# Altium PCB Relay_Card_PCB.PcbDoc (part 1 of 2)
Units mil, origin at the board's own origin, x right, y up, seen from the top; angles counter-clockwise.
Board outline 5600 x 4000 mil, 4 copper layers (Top Layer, Plane(Gnd), Place(Power), Bottom Layer), stack 23.756 mil thick; 178 components, 161 nets, 460 pads, 120 vias.
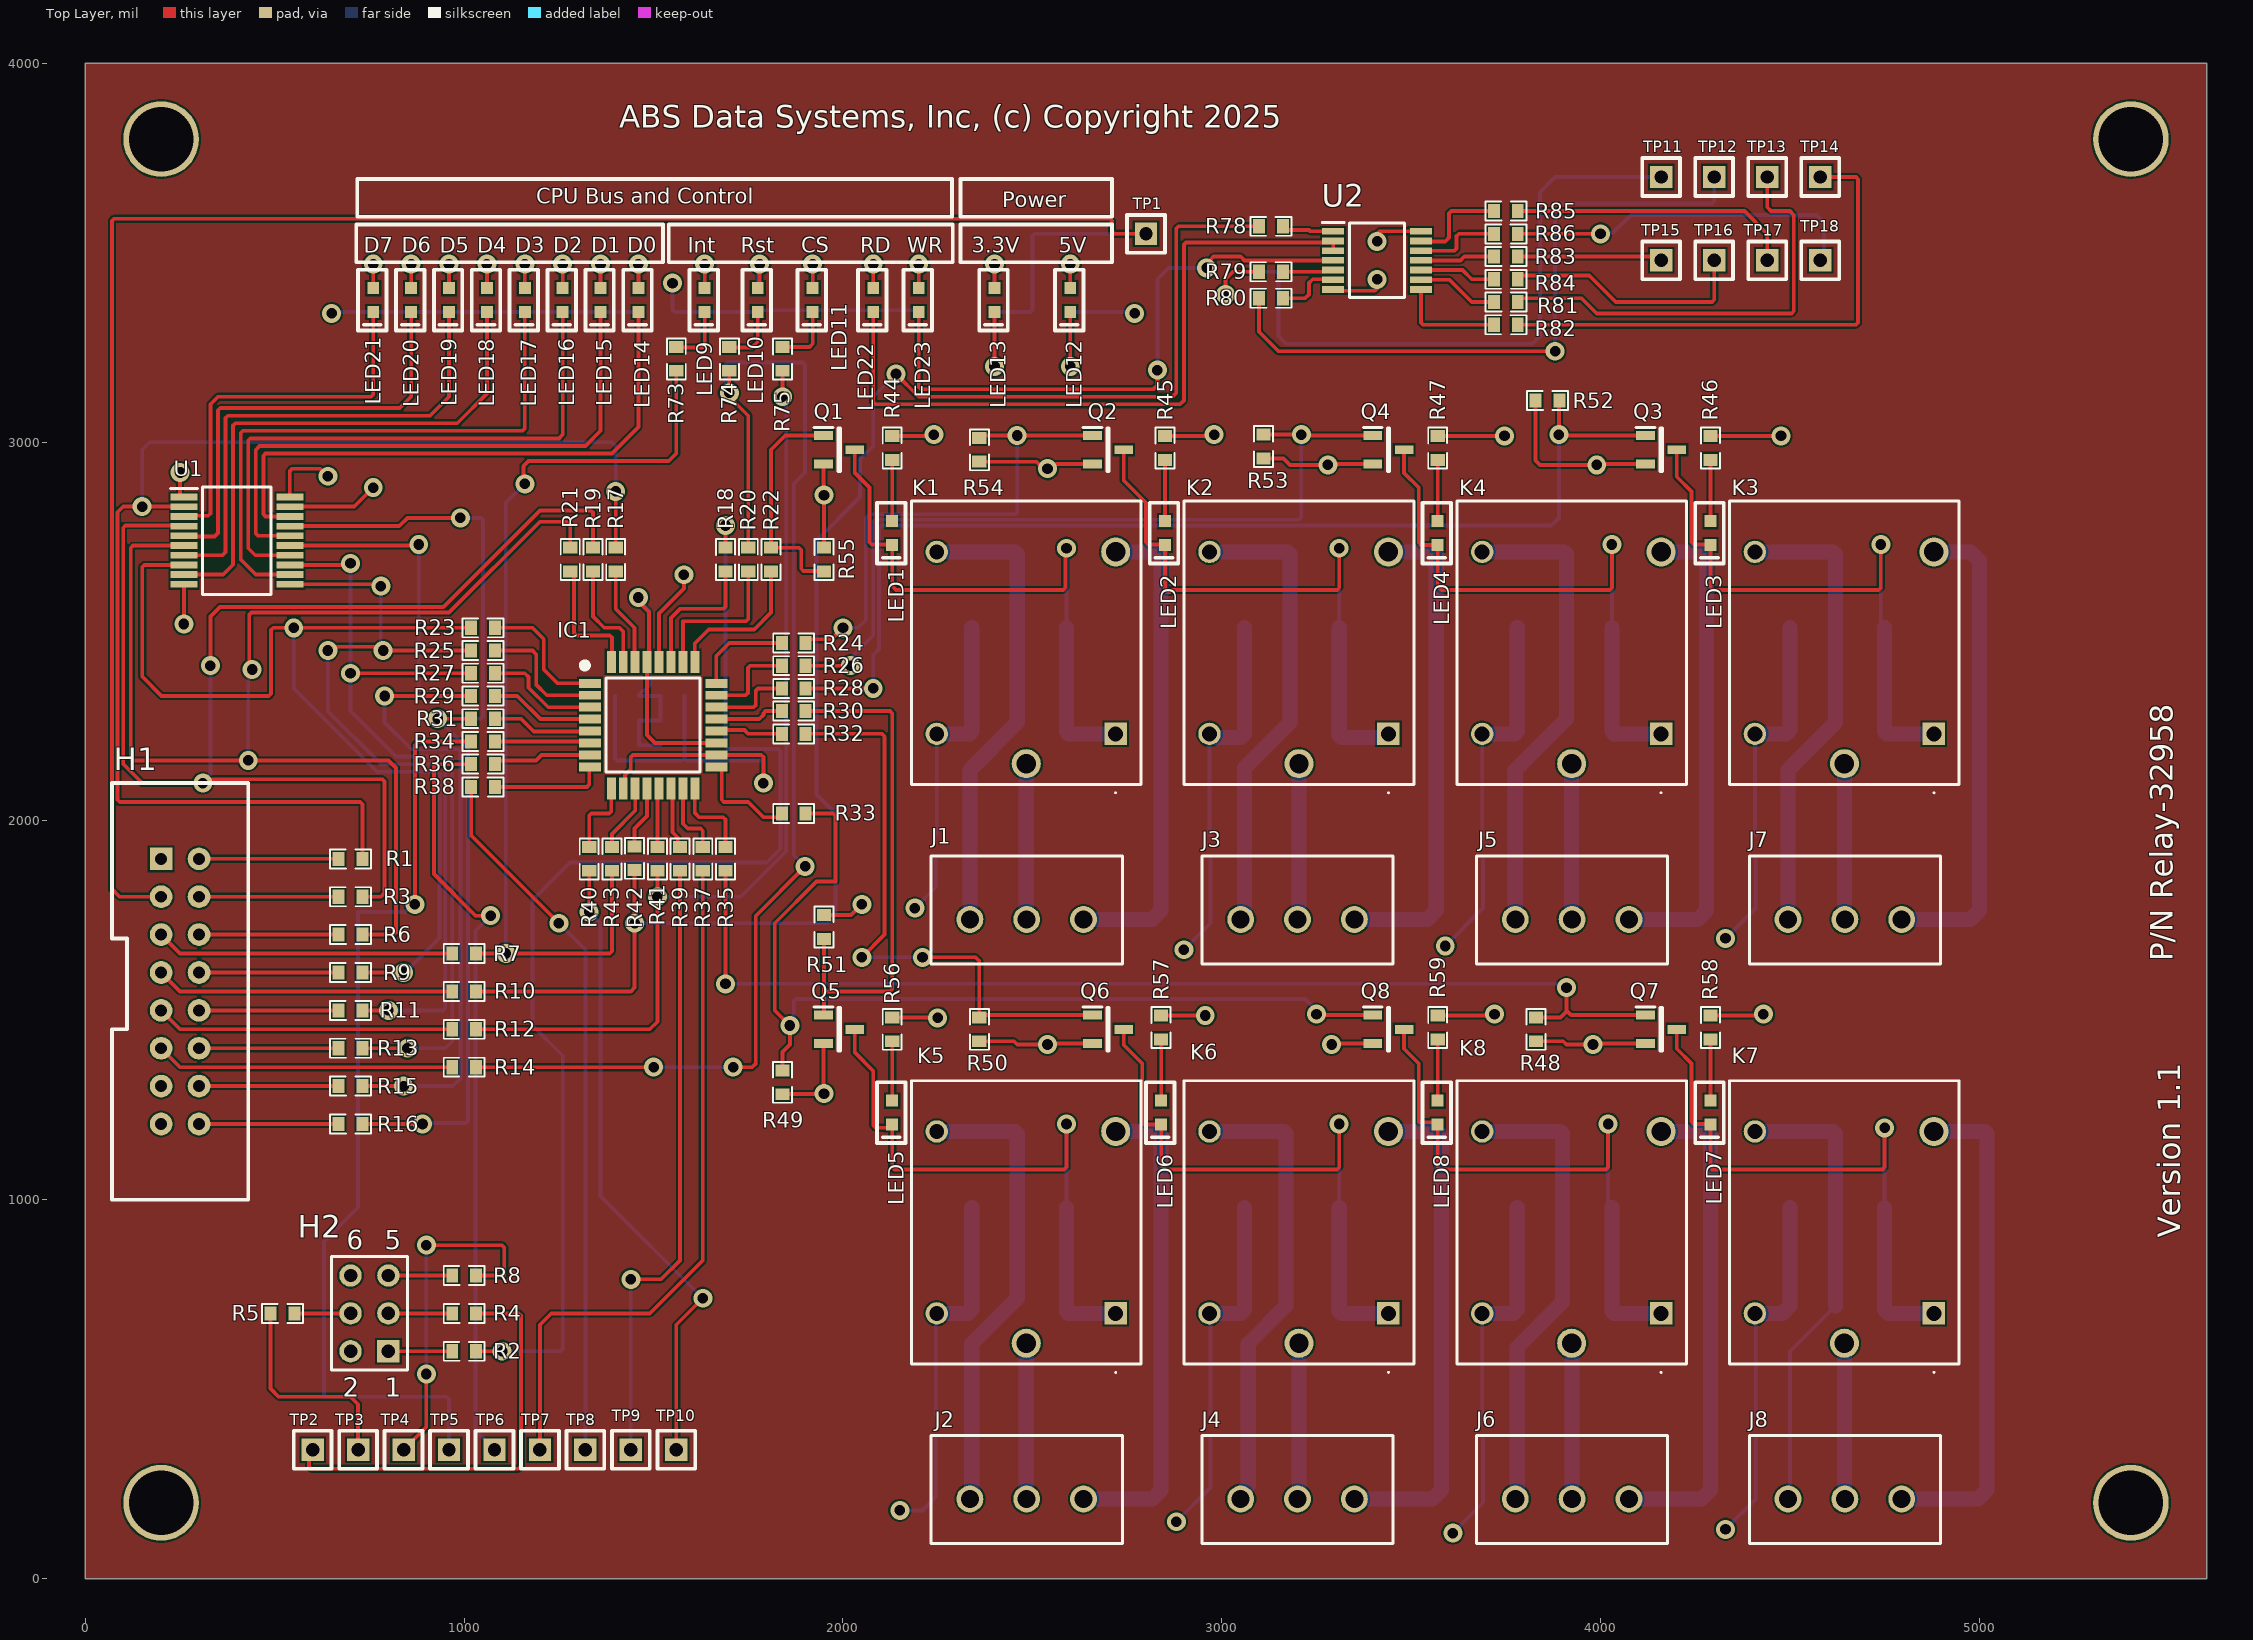
[diagram p0: Top Layer view]
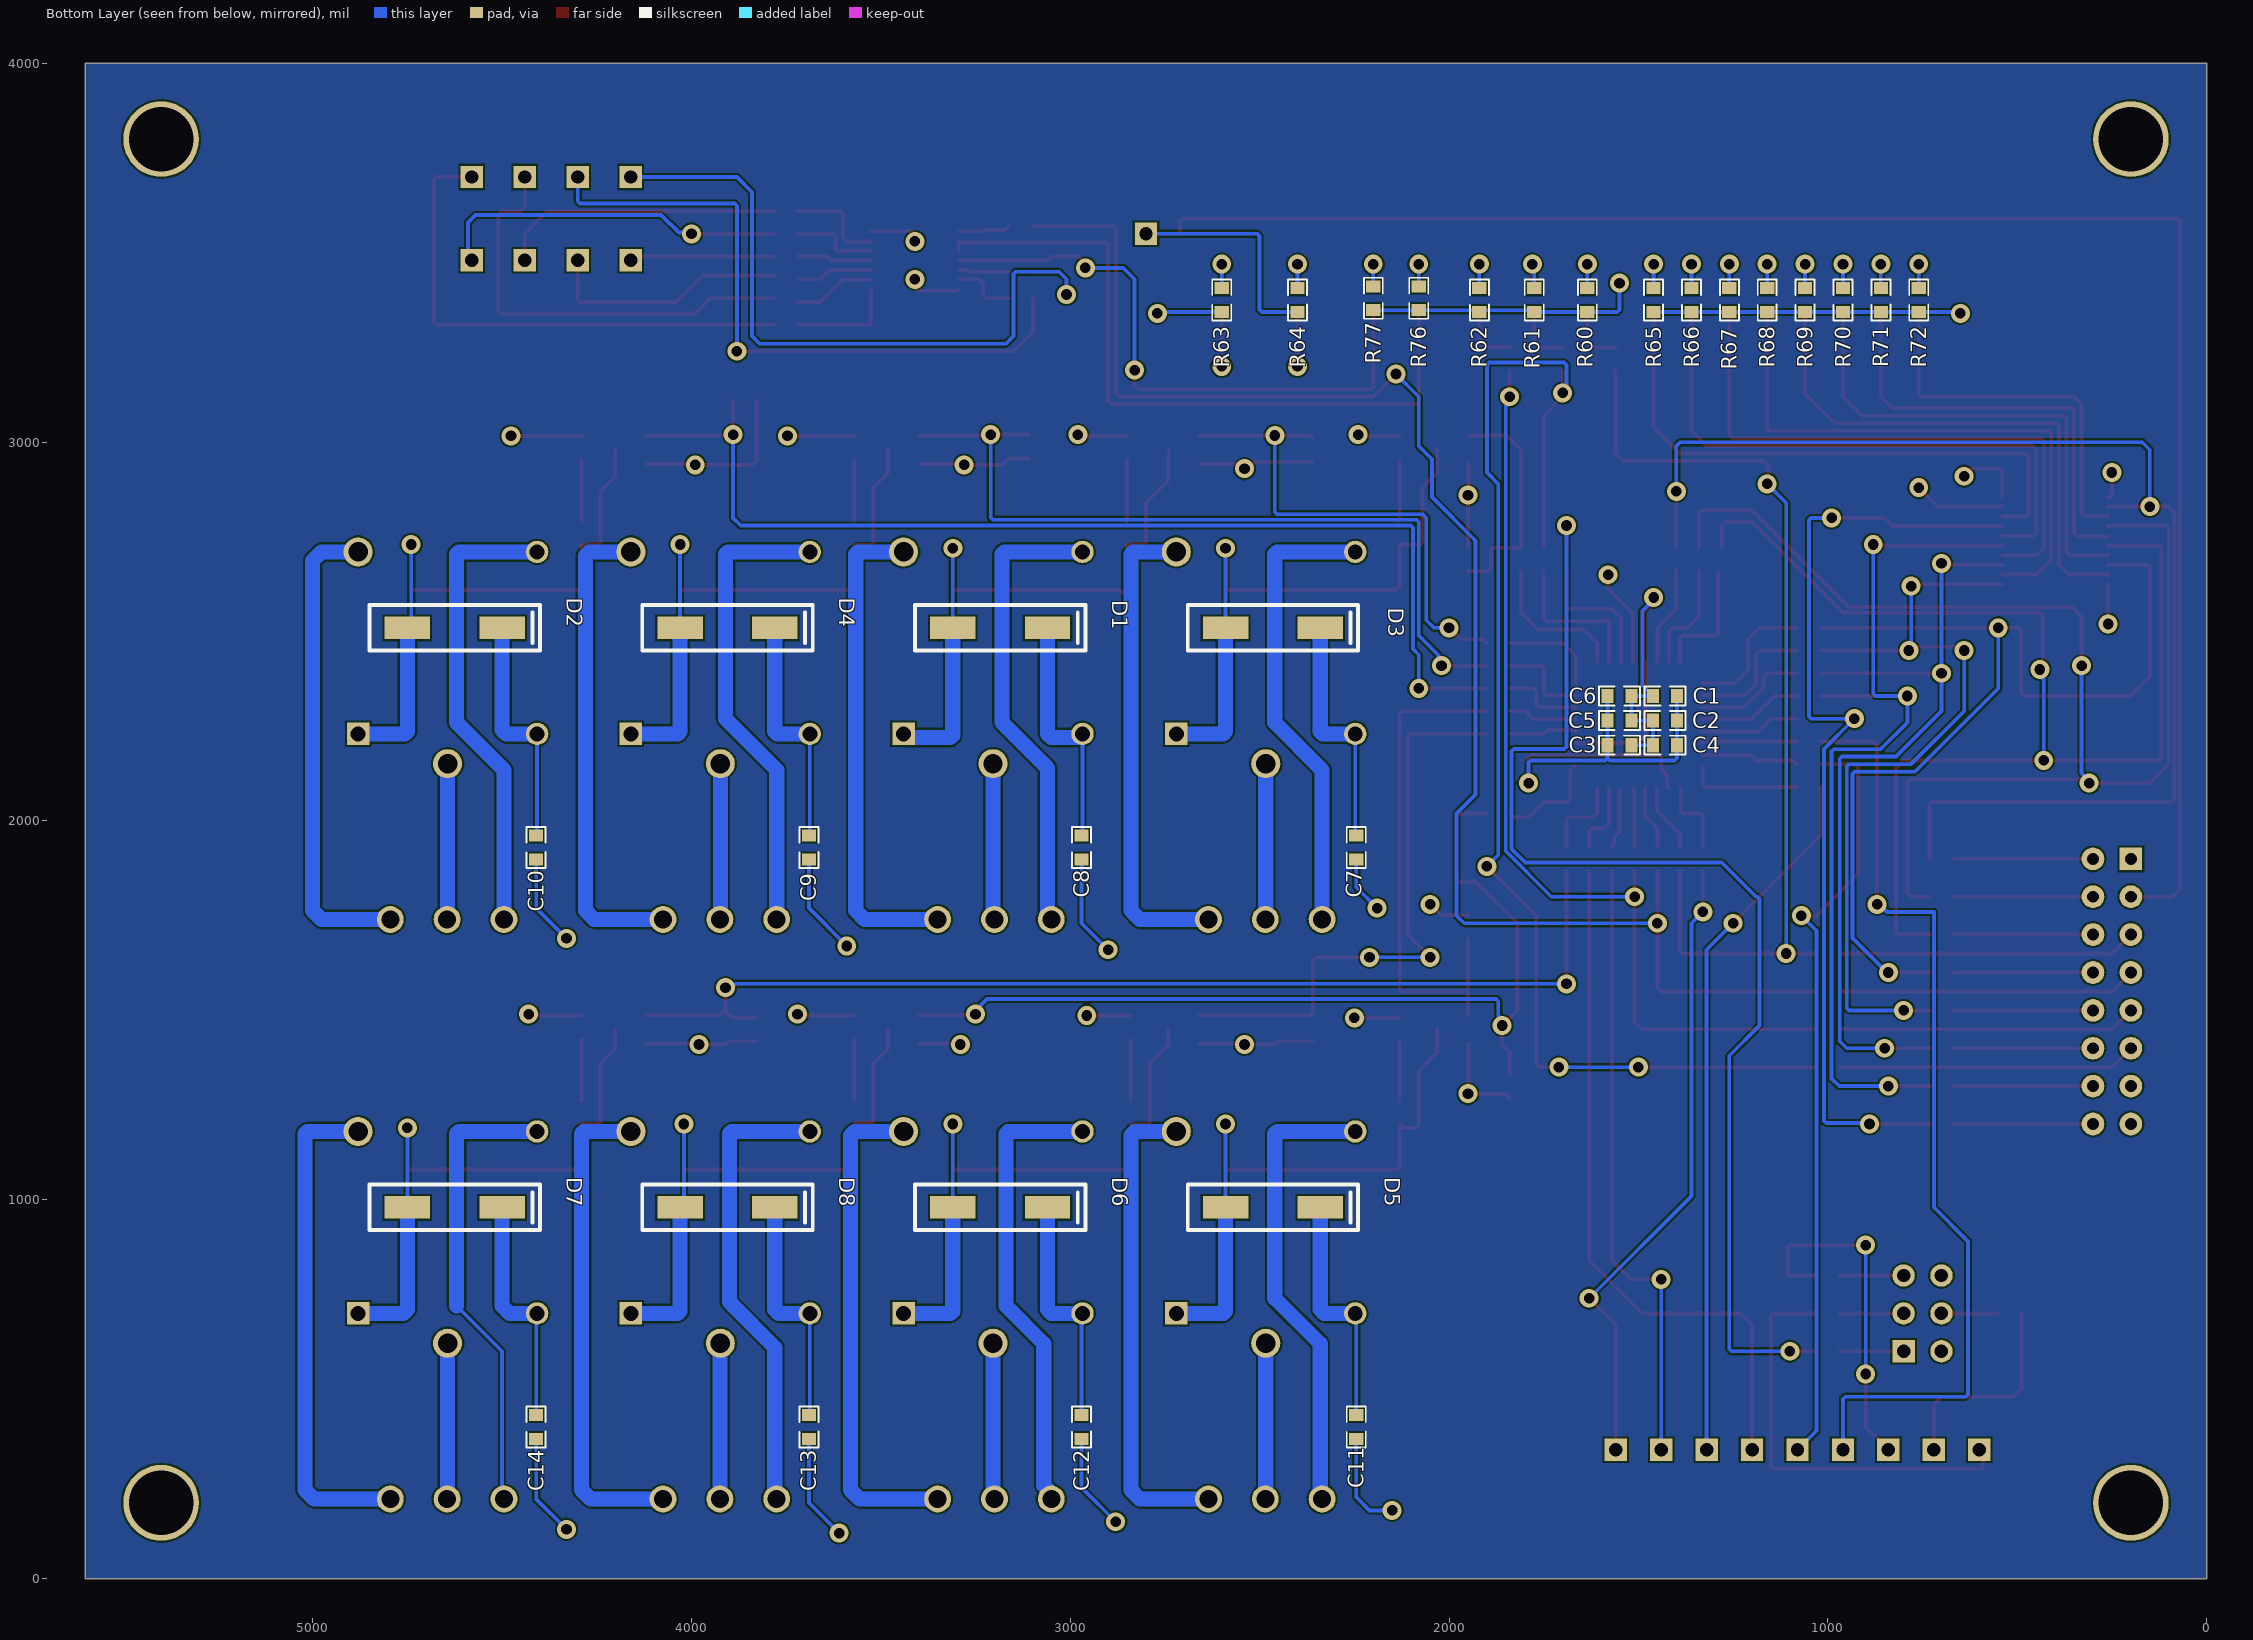
[diagram p1: Bottom Layer view, seen from below]
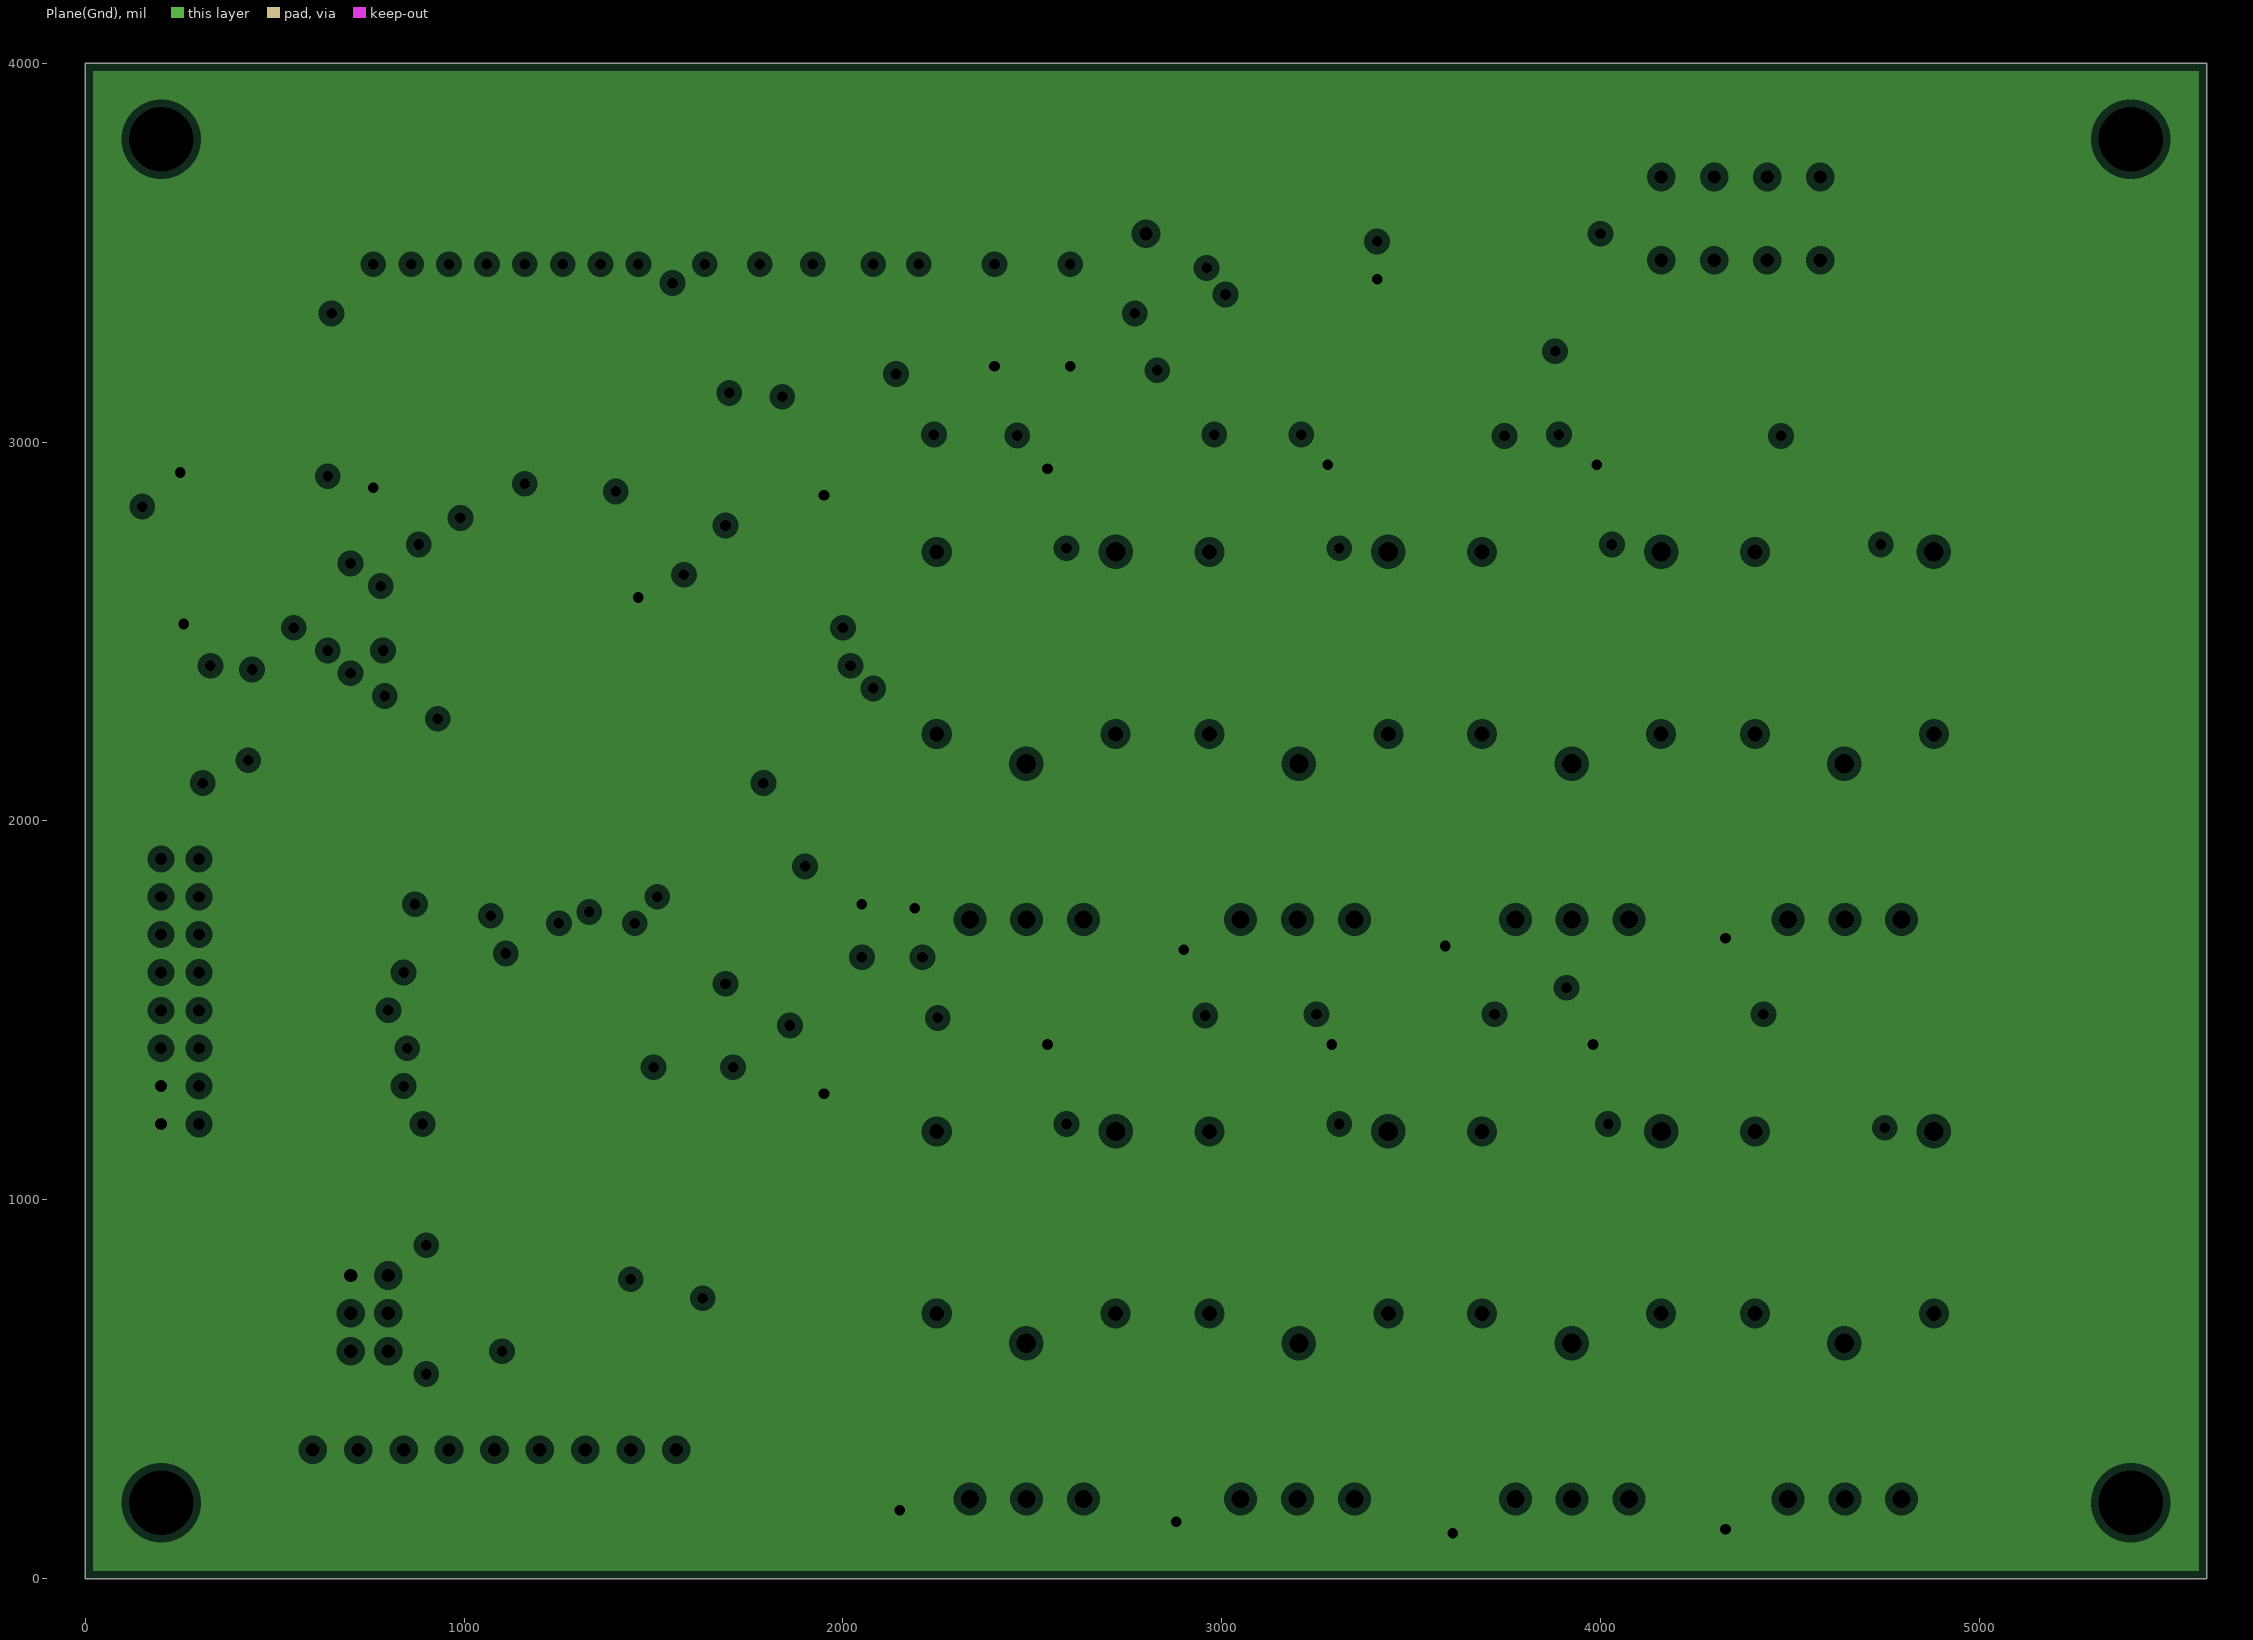
[diagram p2: Plane(Gnd), clearances drawn from the general rule]
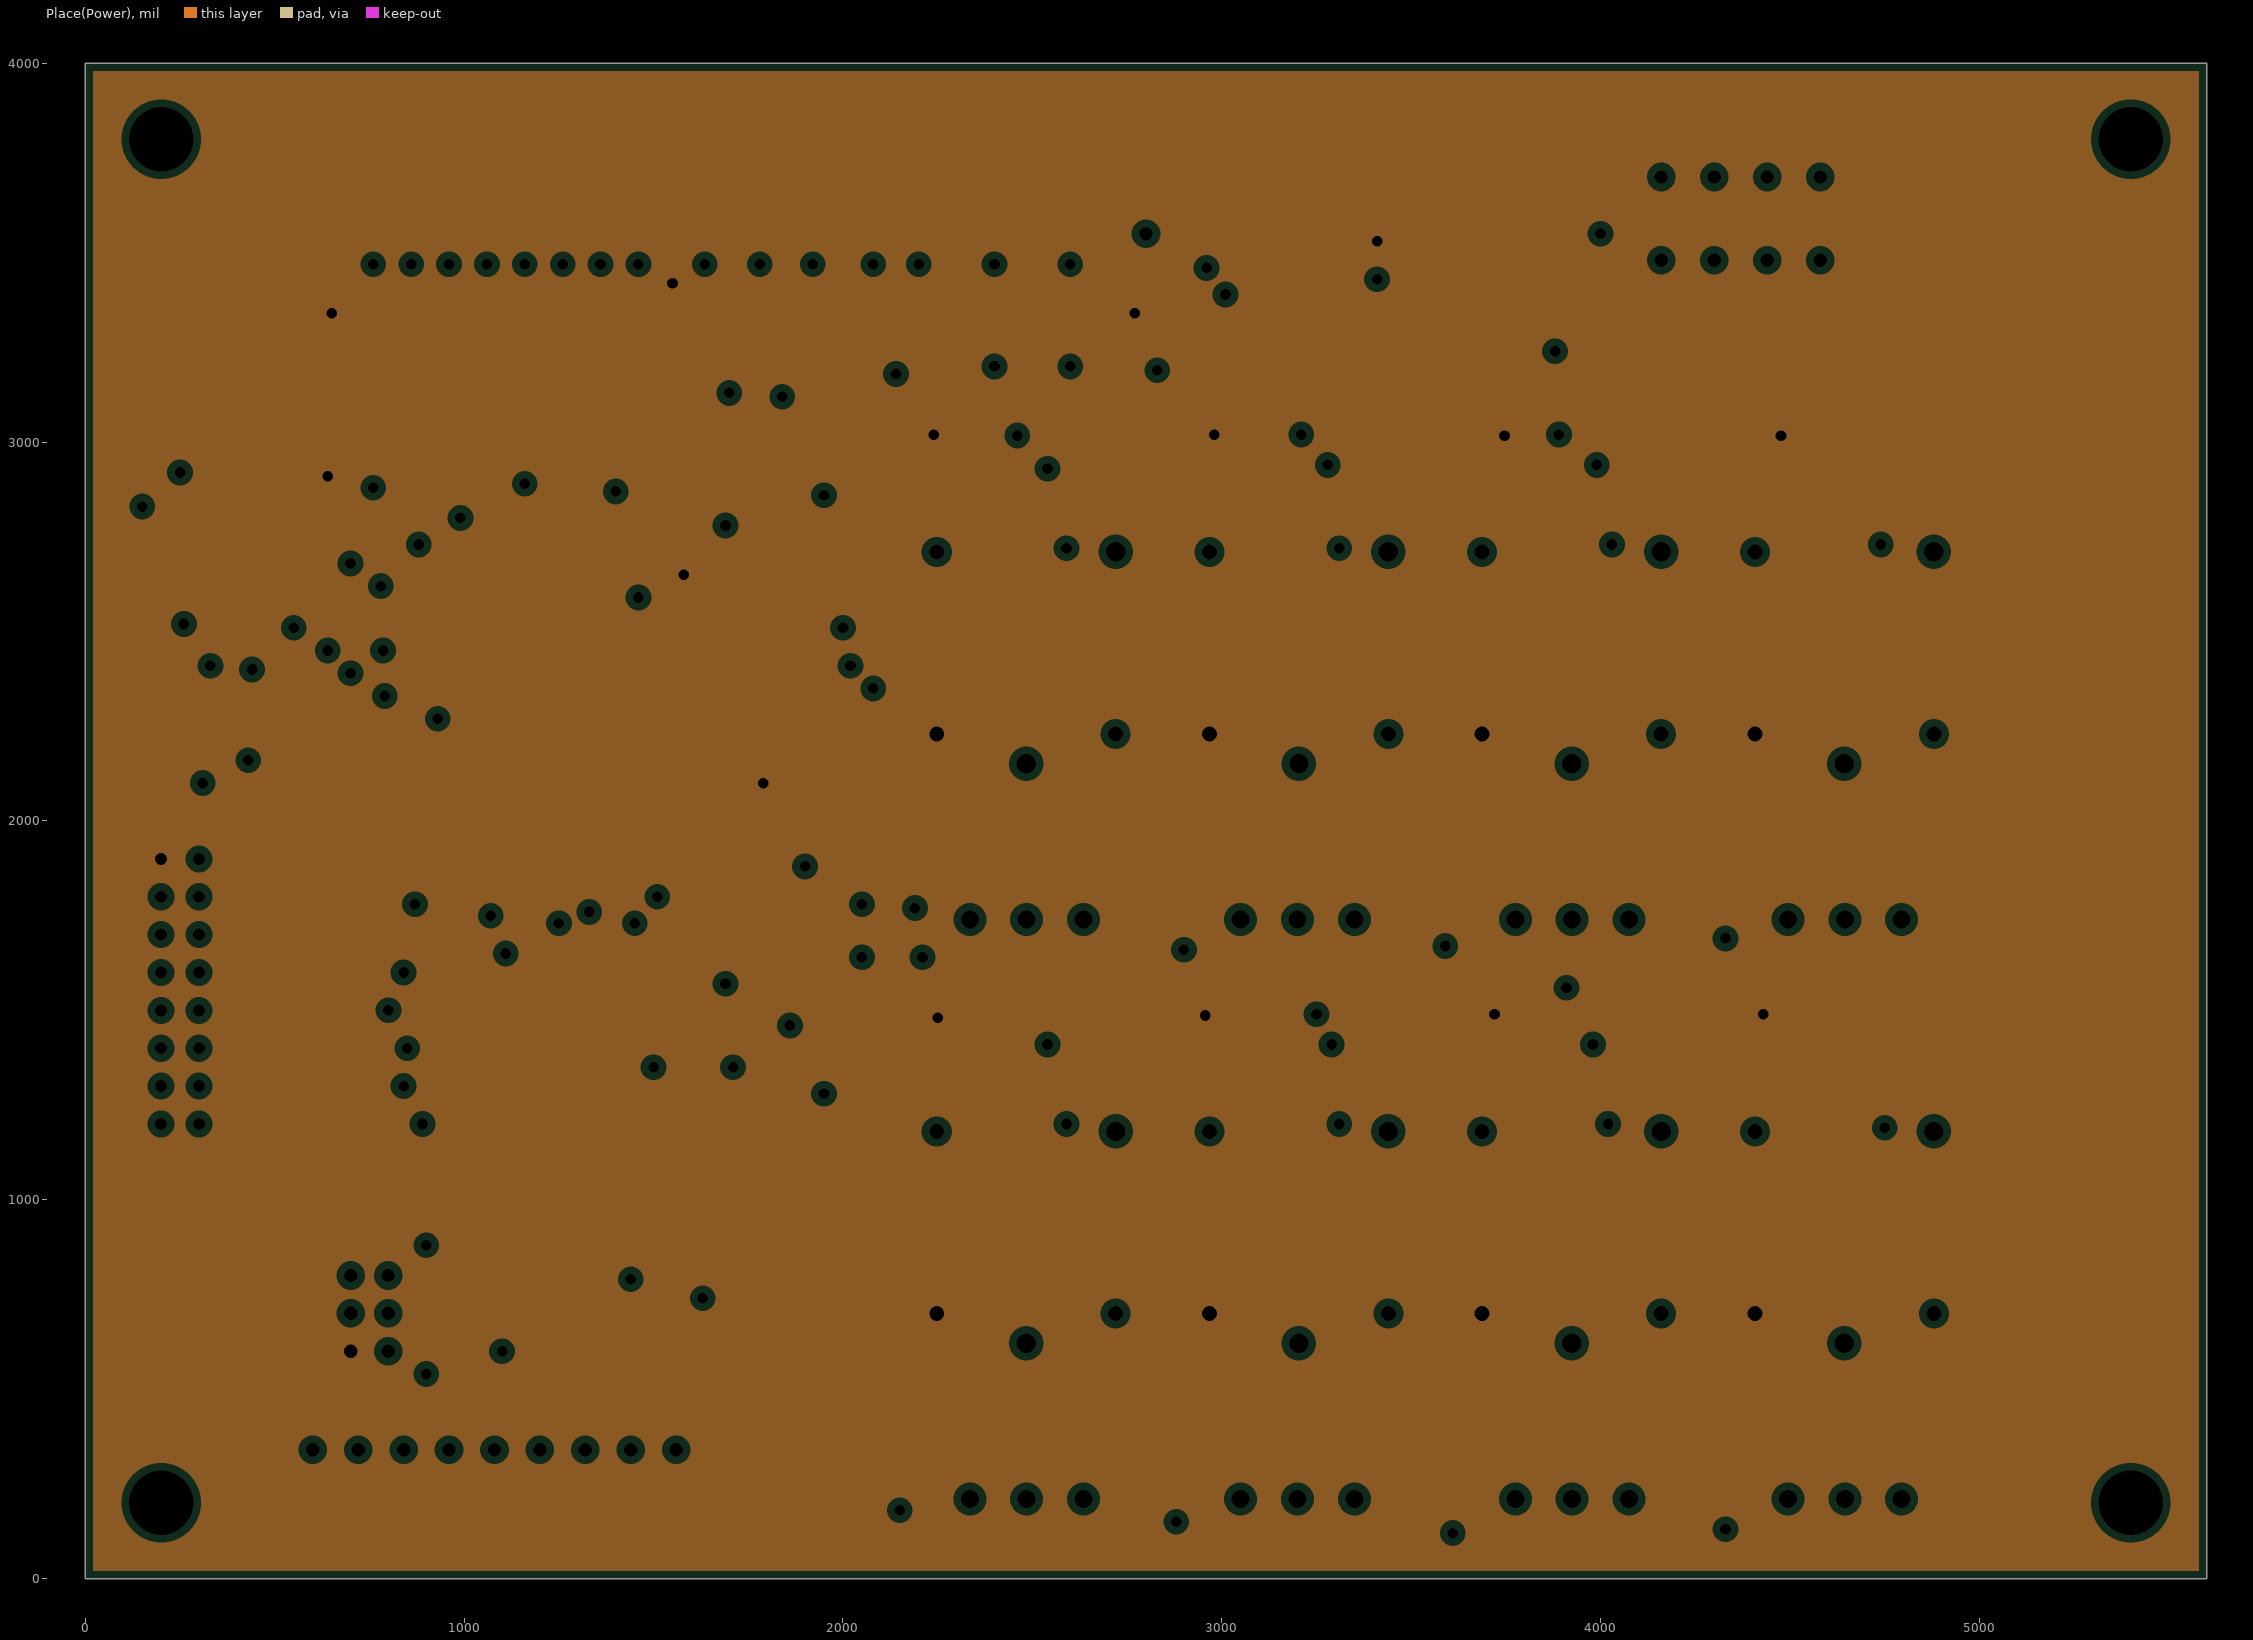
[diagram p3: Place(Power), clearances drawn from the general rule]
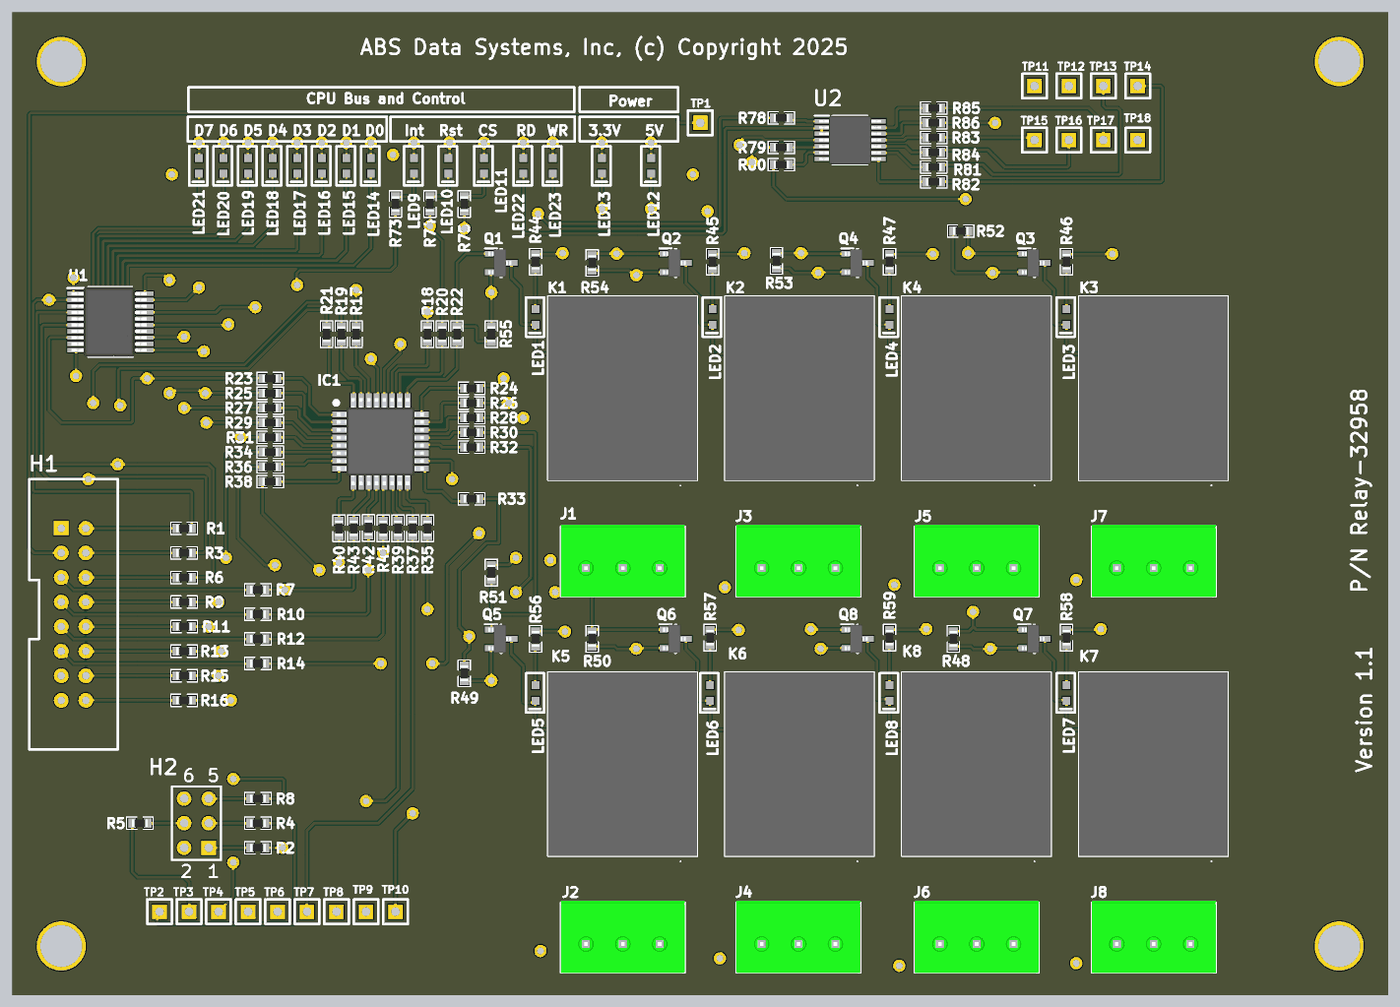
[diagram p4: 3D render of the assembled board from above, using the file's embedded part models]
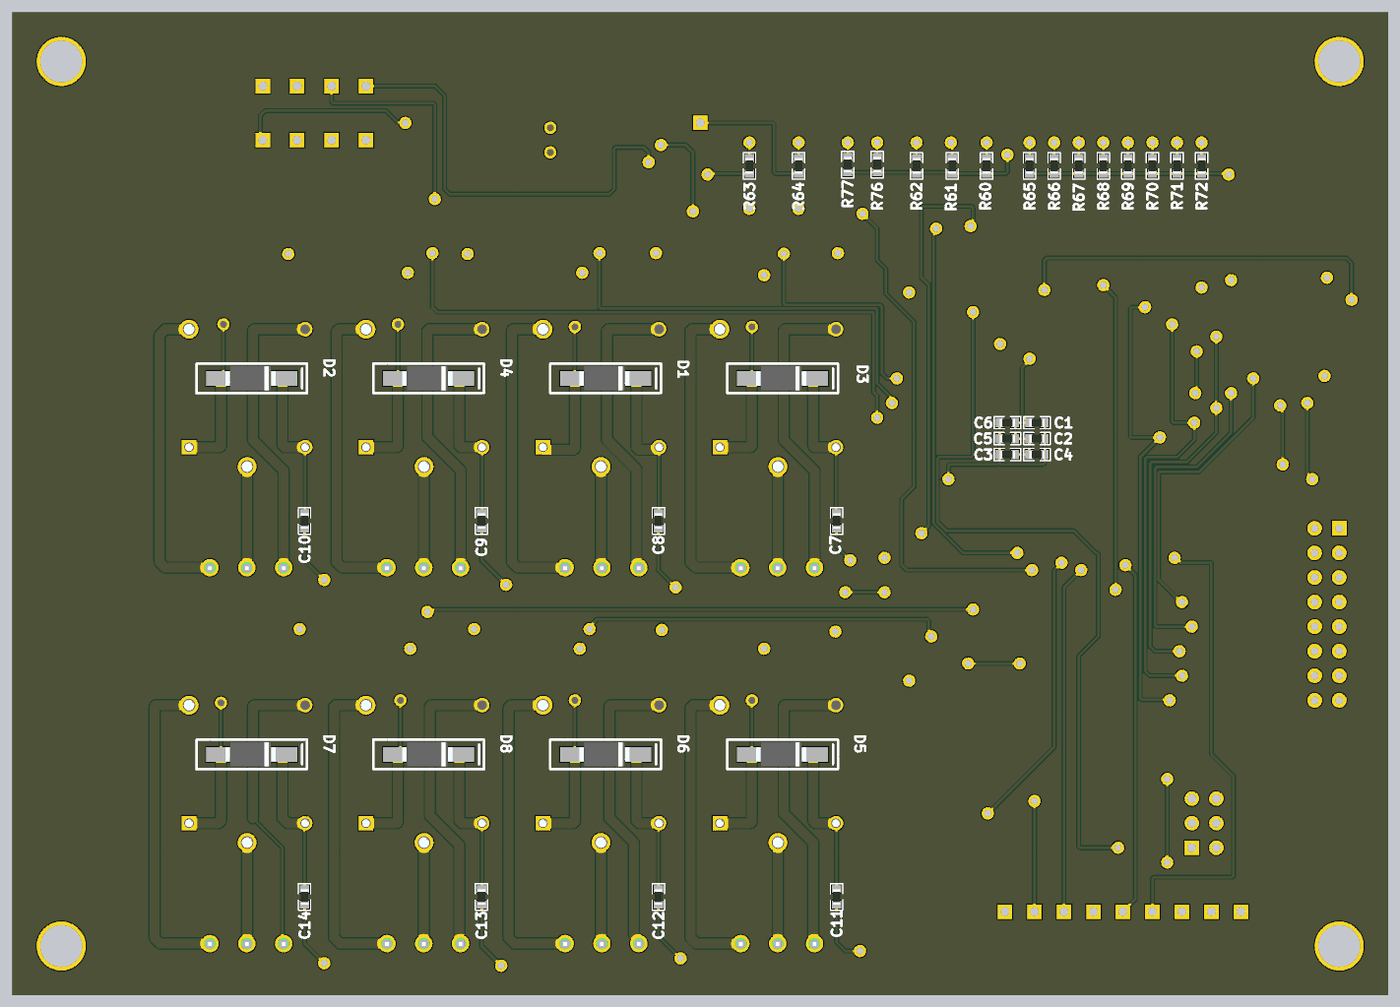
[diagram p5: 3D render of the assembled board from below, using the file's embedded part models]

## Layer stack, top to bottom
Top Solder: solder mask 0.4, Solder Resist, Dk 3.5
Top Layer: signal copper 1.4
Dielectric 2: prepreg 2.8, PP-006, Dk 4.1
Plane(Gnd): plane copper 1.378, net GND
Dielectric 1: dielectric 12.6, FR-4, Dk 4.8
Place(Power): plane copper 1.378, net +5
Dielectric 3: prepreg 2.8, PP-006, Dk 4.1
Bottom Layer: signal copper 1.4
Bottom Solder: solder mask 0.4, Solder Resist, Dk 3.5

## Board outline
0,0 0,4000 5600,4000 5600,0

## Design rules (kind name [scope] priority, off if disabled: settings)
Clearance [All] p1: gap=5 ignorepadtopadclearanceinfootprint=FALSE
HoleSize [All] p1: absolutevalues=TRUE maxlimit=200 minlimit=1 maxpercent=80.000 minpercent=20.000
HoleToHoleClearance [All] p1: gap=5 allowstackedmicrovias=TRUE
MinimumSolderMaskSliver [All] p1: minsoldermaskwidth=5
PlaneClearance [All] p1: clearance=20
PlaneConnect [All] p1: planeconnectstyle=Relief reliefexpansion=20 reliefentries=4 reliefconductorwidth=10 reliefairgap=10
PolygonConnect [All] p1: connectstyle=Relief reliefconductorwidth=10 reliefentries=4 polygonreliefangle="90 Angle" airgapwidth=10
RoutingVias [All] p1: holewidth=28 width=50 viastyle="Through Hole" minholewidth=28 minwidth=50 maxholewidth=28 maxwidth=50
SilkToSilkClearance [All] p1: silktosilkclearance=4
SilkToSolderMaskClearance [IsPad] p1: minsilkscreentomaskgap=3.5 clearancetoexposedcopper=TRUE
SolderMaskExpansion [All] p1: expansion=4 istentingtop=FALSE
Width [All] p1: maxlimit=50 minlimit=5 preferedwidth=10 minimp=50.000000 maximp=50.000000 favimp=50.000000
23 further rules are at their usual default settings.

## Classes and differential pairs
component class RelayCard: C1 C2 C3 C4 C5 C6 D1 D3 D5 D6 D7 H1 H2 IC1 J1 J2 J6 J7 J8 K1 K2 K3 K5 K6 K7 LED1 LED2 LED3 LED5 LED6 LED7 Q1 Q2 Q4 Q5 Q6 Q8 R1 R2 R3 R4 R5 R6 R7 R8 R9 R10 R11 R12 R13 R14 R15 R16 R17 R18 R19 R20 R21 R22 R23 R24 R25 R26 R27 R28 R29 R30 R31 R32 R33 R34 R35 R36 R37 R38 R39 R40 R41 R42 R43 R44 R45 R46 R47 R58 R59 R60 R61 R64 R65 R74 R75 R79 R86 TP1 TP2 TP3 TP4 TP5 TP6 TP7 TP8 TP9 TP10
component class RelayCard_LED_Monitor: C7 C8 C9 C10 C11 C12 C13 C14 LED9 LED10 LED11 LED12 LED13 LED14 LED15 LED16 LED17 LED18 LED19 LED20 LED21 LED22 LED23 R74 R75 R76 R79 R80 R81 R82 R83 R84 R85 R86 TP11 TP12 TP13 TP14 TP15 TP16 TP17 TP18 U1 U2

## Components (designator, comment, footprint, x,y, rotation, side; value= is the part's Value field where it differs from the comment)
C1 "100nf" 0603 1430,2330 r0 bottom
C2 "1uf" 0603 1430,2265 r0 bottom
C3 "100nf" 0603 1550,2200 r180 bottom
C4 "1uf" 0603 1430,2200 r0 bottom
C5 "100nf" 0603 1550,2265 r180 bottom
C6 "1uf" 0603 1550,2330 r180 bottom
C7 "100nf" 0603 2245,1930 r270 bottom locked
C8 "100nf" 0603 2970,1930 r270 bottom locked
C9 "100nf" 0603 3690,1930 r270 bottom locked
C10 "100nf" 0603 4410,1930 r270 bottom locked
C11 "100nf" 0603 2245,400 r270 bottom locked
C12 "100nf" 0603 2970,400 r270 bottom locked
C13 "100nf" 0603 3690,400 r270 bottom locked
C14 "100nf" 0603 4410,400 r270 bottom locked
D1 "S3AFGHM3" DO-221AC 3160,2510 r180 bottom locked
D2 "S3AFGHM3" DO-221AC 4600,2510 r180 bottom locked
D3 "S3AFGHM3" DO-221AC 2440,2510 r180 bottom locked
D4 "S3AFGHM3" DO-221AC 3880,2510 r180 bottom locked
D5 "S3AFGHM3" DO-221AC 2440,980 r180 bottom locked
D6 "S3AFGHM3" DO-221AC 3160,980 r180 bottom locked
D7 "S3AFGHM3" DO-221AC 4600,980 r180 bottom locked
D8 "S3AFGHM3" DO-221AC 3880,980 r180 bottom locked
H1 "Header_IDC_2x8" HEADER16 200,1900 r0 top locked
H2 "UDPI Programmer" HDR2X3 800,600 r90 top
IC1 "AVR64DD32-I_PT" QFP80P900X900X120-32N 1498.74,2253.15 r0 top
J1 "1803439" 1803439 2335,1740 r180 top locked
J2 "1803439" 1803439 2335,210 r180 top locked
J3 "1803439" 1803439 3050,1740 r180 top locked
J4 "1803439" 1803439 3050,210 r180 top locked
J5 "1803439" 1803439 3775,1740 r180 top
J6 "1803439" 1803439 3775,210 r180 top locked
J7 "1803439" 1803439 4495,1740 r180 top locked
J8 "1803439" 1803439 4495,210 r180 top locked
K1 "AWHSH105D00G" AWHSH105D00G 2720,2230 r90 top locked
K2 "AWHSH105D00G" AWHSH105D00G 3440,2230 r90 top locked
K3 "AWHSH105D00G" AWHSH105D00G 4880,2230 r90 top locked
K4 "AWHSH105D00G" AWHSH105D00G 4160,2230 r90 top locked
K5 "AWHSH105D00G" AWHSH105D00G 2720,700 r90 top locked
K6 "AWHSH105D00G" AWHSH105D00G 3440,700 r90 top locked
K7 "AWHSH105D00G" AWHSH105D00G 4880,700 r90 top locked
K8 "AWHSH105D00G" AWHSH105D00G 4160,700 r90 top locked
LED1 "green" 0603_Diode 2130,2760 r90 top locked
LED2 "green" 0603_Diode 2850,2760 r90 top locked
LED3 "green" 0603_Diode 4290,2760 r90 top locked
LED4 "green" 0603_Diode 3570,2760 r90 top locked
LED5 "green" 0603_Diode 2130,1230 r90 top locked
LED6 "green" 0603_Diode 2840,1230 r90 top locked
LED7 "green" 0603_Diode 4290,1230 r90 top locked
LED8 "green" 0603_Diode 3570,1230 r90 top locked
LED9 "green" 0603_Diode 1635,3375 r90 top
LED10 "green" 0603_Diode 1775,3375 r90 top
LED11 "green" 0603_Diode 1920,3375 r90 top
LED12 "green" 0603_Diode 2600,3375 r90 top locked
LED13 "green" 0603_Diode 2400,3375 r90 top locked
LED14 "green" 0603_Diode 1460,3375 r90 top locked
LED15 "green" 0603_Diode 1360,3375 r90 top locked
LED16 "green" 0603_Diode 1260,3375 r90 top locked
LED17 "green" 0603_Diode 1160,3375 r90 top locked
LED18 "green" 0603_Diode 1060,3375 r90 top locked
LED19 "green" 0603_Diode 960,3375 r90 top locked
LED20 "green" 0603_Diode 860,3375 r90 top locked
LED21 "green" 0603_Diode 760,3375 r90 top locked
LED22 "green" 0603_Diode 2080,3375 r90 top
LED23 "red" 0603_Diode 2200,3375 r90 top
Q1 "FDV301N" SOT96P237X111-3N 1990,2980 r0 top locked
Q2 "FDV301N" SOT96P237X111-3N 2700,2980 r0 top locked
Q3 "FDV301N" SOT96P237X111-3N 4160,2980 r0 top locked
Q4 "FDV301N" SOT96P237X111-3N 3440,2980 r0 top locked
Q5 "FDV301N" SOT96P237X111-3N 1990,1450 r0 top locked
Q6 "FDV301N" SOT96P237X111-3N 2700,1450 r0 top locked
Q7 "FDV301N" SOT96P237X111-3N 4160,1450 r0 top locked
Q8 "FDV301N" SOT96P237X111-3N 3440,1450 r0 top locked
R1 "0R" 0603 700,1900 r180 top locked
R2 "0R" 0603 1000,600 r180 top
R3 "0R" 0603 700,1800 r180 top locked
R4 "0R" 0603 1000,700 r180 top
R5 "0R" 0603 520,700 r180 top
R6 "0R" 0603 700,1700 r180 top locked
R7 "0R" 0603 1000,1650 r0 top locked
R8 "0R" 0603 1000,800 r180 top
R9 "0R" 0603 700,1600 r180 top locked
R10 "0R" 0603 1000,1550 r0 top locked
R11 "0R" 0603 700,1500 r180 top locked
R12 "0R" 0603 1000,1450 r0 top locked
R13 "0R" 0603 700,1400 r180 top locked
R14 "0R" 0603 1000,1350 r0 top locked
R15 "0R" 0603 700,1300 r180 top locked
R16 "0R" 0603 700,1200 r180 top locked
R17 "0R" 0603 1400,2690 r270 top
R18 "0R" 0603 1690,2690 r90 top
R19 "0R" 0603 1340,2690 r270 top
R20 "0R" 0603 1750,2690 r90 top
R21 "0R" 0603 1280,2690 r270 top
R22 "0R" 0603 1810,2690 r90 top
R23 "0R" 0603 1050,2510 r0 top
R24 "0R" 0603 1870,2470 r0 top
R25 "0R" 0603 1050,2450 r0 top
R26 "0R" 0603 1870,2410 r0 top
R27 "0R" 0603 1050,2390 r0 top
R28 "0R" 0603 1870,2350 r0 top
R29 "0R" 0603 1050,2330 r0 top
R30 "0R" 0603 1870,2290 r0 top
R31 "0R" 0603 1050,2270 r0 top
R32 "0R" 0603 1870,2230 r0 top
R33 "0R" 0603 1870,2020 r0 top
R34 "0R" 0603 1050,2210 r0 top
R35 "0R" 0603 1690,1900 r270 top
R36 "0R" 0603 1050,2150 r0 top
R37 "0R" 0603 1630,1900 r270 top
R38 "0R" 0603 1050,2090 r0 top
R39 "0R" 0603 1570,1900 r270 top
R40 "0R" 0603 1330,1900 r90 top
R41 "0R" 0603 1510,1900 r270 top
R42 "0R" 0603 1450,1901.5 r270 top
R43 "0R" 0603 1390,1900 r270 top
R44 "180" 0603 2130,2985 r90 top locked
R45 "180" 0603 2850,2985 r90 top locked
R46 "180" 0603 4290,2985 r90 top locked
R47 "180" 0603 3570,2985 r90 top locked
R48 "4.7k" 0603 3830,1450 r270 top
R49 "4.7k" 0603 1840,1310 r270 top
R50 "4.7k" 0603 2360,1450 r270 top
R51 "4.7k" 0603 1950,1720 r90 top
R52 "4.7k" 0603 3860,3110 r180 top
R53 "4.7k" 0603 3110,2988.5 r270 top
R54 "4.7k" 0603 2360,2980 r270 top
R55 "4.7k" 0603 1950,2690 r90 top
R56 "180" 0603 2130,1450 r90 top locked
R57 "180" 0603 2840,1455 r90 top locked
R58 "180" 0603 4290,1455 r90 top locked
R59 "180" 0603 3570,1455 r90 top locked
R60 "180" 0603 1635,3375 r270 bottom
R61 "180" 0603 1775,3375 r270 bottom
R62 "180" 0603 1920,3375 r270 bottom
R63 "180" 0603 2600,3375 r270 bottom locked
R64 "180" 0603 2400,3375 r270 bottom locked
R65 "180" 0603 1460,3375 r270 bottom locked
R66 "180" 0603 1360,3375 r270 bottom locked
R67 "180" 0603 1260,3375 r270 bottom locked
R68 "180" 0603 1160,3375 r270 bottom locked
R69 "180" 0603 1060,3375 r270 bottom locked
R70 "180" 0603 960,3375 r270 bottom locked
R71 "180" 0603 860,3375 r270 bottom locked
R72 "180" 0603 760,3375 r270 bottom locked
R73 "0R" 0603 1560,3220 r90 top
R74 "0R" 0603 1700,3220 r90 top
R75 "0R" 0603 1840,3220 r90 top
R76 "180" 0603 2080,3380 r270 bottom
R77 "180" 0603 2200,3380 r270 bottom
R78 "0R" 0603 3130,3570 r0 top
R79 "0R" 0603 3130,3450 r0 top
R80 "0R" 0603 3130,3380 r180 top
R81 "0R" 0603 3750,3370 r180 top
R82 "0R" 0603 3750,3310 r0 top
R83 "0R" 0603 3750,3490 r180 top
R84 "0R" 0603 3750,3430 r0 top
R85 "0R" 0603 3750,3610 r180 top
R86 "0R" 0603 3750,3550 r0 top
TP1 "TP" TP 2800,3550 r0 top
TP2 "TP" TP 600,340 r0 top
TP3 "TP" TP 720,340 r0 top
TP4 "TP" TP 840,340 r0 top
TP5 "TP" TP 960,340 r0 top
TP6 "TP" TP 1080,340 r0 top
TP7 "TP" TP 1200,340 r0 top
TP8 "TP" TP 1320,340 r0 top
TP9 "TP" TP 1440,340 r0 top
TP10 "TP" TP 1560,340 r0 top
TP11 "TP" TP 4160,3700 r0 top locked
TP12 "TP" TP 4300,3700 r0 top locked
TP13 "TP" TP 4440,3700 r0 top locked
TP14 "TP" TP 4580,3700 r0 top locked
TP15 "TP" TP 4160,3480 r0 top locked
TP16 "TP" TP 4300,3480 r0 top locked
TP17 "TP" TP 4440,3480 r0 top locked
TP18 "TP" TP 4580,3480 r0 top locked
U1 "SN74ABT240ADBR" SOP65P780X200-20N 400,2740 r0 top locked
U2 "SN74AC04PWR" SOP65P640X120-14N 3410,3480 r0 top locked

## Footprints (in the part's own frame and the unit in brackets; to place one, negate y for a bottom-side part, rotate by r counter-clockwise, add the part's x,y. Pads: shape width x height; smd on the part's side, far side on the other; paste and mask are expansions set on the pad)
0603 [mm]
  rect 0.8x0.95 smd: 1(-0.8,0) 2(0.8,0)
  silkscreen extent -1.37,-0.64 1.37,0.64, body extent -0.8,-0.4 0.8,0.4, height 0.55
0603_Diode [mm]
  rect 0.8x0.8 smd: 1(-0.8,0) 2(0.8,0)
  silkscreen extent -2.03,-0.89 2.03,1.02
1803439 [mm]
  round 1.8 hole 1.2: 1(-7.62,0) 2(-3.81,0) 3(0,0)
  silkscreen extent -10.22,-4.25 2.6,3, body extent -10.22,-4.45 2.6,3.05, height 9.33
AWHSH105D00G [mm]
  rect 1.5x1.5 hole 1: 1(0,0)
  round 1.95 hole 1.3: 2(12.2,0) 4(-2,6)
  round 1.5 hole 1: 3(0,12) 5(12.2,12)
  silkscreen extent -4,-1.7 15.6,13.7, body extent -3.4,-1.7 15.6,13.7, height 15.4
DO-221AC [mil]
  rect 120x60 smd: 1(100,0) 2(-150,0)
  silkscreen extent -250,-60 200,60, body extent -132,-51 72,51, height 43
HDR2X3 [mm] "Connector; Header; 3x2 Position"
  rect 1.5x1.5 hole 0.9: 1(0,0)
  round 1.5 hole 0.9: 2(0,2.54) 3(2.54,0) 4(2.54,2.54) 5(5.08,0) 6(5.08,2.54)
  silkscreen extent -1.27,-1.27 6.35,3.81
HEADER16 [mil]
  rect 60x60 hole 31.5: 1(0,0)
  round 60 hole 31.5: 2(100,0) 3(0,-100) 4(100,-100) 5(0,-200) 6(100,-200) 7(0,-300) 8(100,-300) 9(0,-400) 10(100,-400) 11(0,-500) 12(100,-500) 13(0,-600) 14(100,-600) 15(0,-700) 16(100,-700)
  silkscreen extent -130,-900 230,200
QFP80P900X900X120-32N [mm]
  rect 1.475x0.6 smd: 1(-4.238,2.8) 2(-4.238,2) 3(-4.238,1.2) 4(-4.238,0.4) 5(-4.238,-0.4) 6(-4.238,-1.2) 7(-4.238,-2) 8(-4.238,-2.8) 17(4.238,-2.8) 18(4.238,-2) 19(4.238,-1.2) 20(4.238,-0.4) 21(4.238,0.4) 22(4.238,1.2) 23(4.238,2) 24(4.238,2.8)
  rect 0.6x1.475 smd: 9(-2.8,-4.238) 10(-2,-4.238) 11(-1.2,-4.238) 12(-0.4,-4.238) 13(0.4,-4.238) 14(1.2,-4.238) 15(2,-4.238) 16(2.8,-4.238) 25(2.8,4.238) 26(2,4.238) 27(1.2,4.238) 28(0.4,4.238) 29(-0.4,4.238) 30(-1.2,4.238) 31(-2,4.238) 32(-2.8,4.238)
  silkscreen extent -4.77,-3.15 3.15,4.2, body extent -4.5,-4.5 4.5,4.5, height 1.2
SOP65P640X120-14N [mm]
  rect 1.475x0.45 smd: 1(-2.938,1.95) 2(-2.938,1.3) 3(-2.938,0.65) 4(-2.938,0) 5(-2.938,-0.65) 6(-2.938,-1.3) 7(-2.938,-1.95) 8(2.938,-1.95) 9(2.938,-1.3) 10(2.938,-0.65) 11(2.938,0) 12(2.938,0.65) 13(2.938,1.3) 14(2.938,1.95)
  silkscreen extent -3.67,-2.5 1.85,2.52, body extent -3.2,-2.5 3.2,2.5, height 1.13
SOP65P780X200-20N [mm]
  rect 1.8x0.45 smd: 1(-3.55,2.925) 2(-3.55,2.275) 3(-3.55,1.625) 4(-3.55,0.975) 5(-3.55,0.325) 6(-3.55,-0.325) 7(-3.55,-0.975) 8(-3.55,-1.625) 9(-3.55,-2.275) 10(-3.55,-2.925) 11(3.55,-2.925) 12(3.55,-2.275) 13(3.55,-1.625) 14(3.55,-0.975) 15(3.55,-0.325) 16(3.55,0.325) 17(3.55,0.975) 18(3.55,1.625) 19(3.55,2.275) 20(3.55,2.925)
  silkscreen extent -4.45,-3.6 2.3,3.6, body extent -4.03,-3.6 3.77,3.6, height 1.9
SOT96P237X111-3N [mm]
  rect 1.25x0.6 smd: 1(-1.05,0.955) 2(-1.05,-0.955) 3(1.05,0)
  silkscreen extent -1.68,-1.46 0.08,1.51, body extent -1.31,-1.46 1.06,1.46, height 1.11
TP [mm] "Test Point"
  rect 1.5x1.5 hole 0.9: 1(0,0)
  silkscreen extent -1.27,-1.27 1.27,1.27

## Part data
C1 C3 C5 C7 C8 C9 C10 C11 C12 C13 C14: library part CL10B104JB8NNNC, "Samsung Electro-Mechanics 0603 100nf"
C2 C4 C6: library part CL10B105KA8NNNL, "Samsung Electro-Mechanics 0603 1uf"
D1 D2 D3 D4 D5 D6 D7 D8: library part S3AFGHM3/I, "Rectifiers VR=400V, IO=3A", Manufacturer_Name="Comchip Technology", Manufacturer_Part_Number=1N4001-G, Mouser Part Number=750-1N4001-G, Datasheet Link=https://datasheet.datasheetarchive.com/originals/distributors/Datasheets-7/DSA-138621.pdf, Mouser Price/Stock=https://www.mouser.co.uk/ProductDetail/Comchip-Technology/1N4001-G?qs=2qJf6qQ4IOKJYZQUWvVExw%3D%3D
H1: "16 Pin 2x8 Through Hold IDC Connector", Color=Black, Manufacturer=Samtec, Manufacturer Part Number=TST-108-01-G-D, Max Operating Temperature=125°C, Min Operating Temperature=-55°C, Supplier Part Number 1=SAM10835-ND, Category="Headers and Wire Housings", ComponentLink1Description=https://datasheet.ciiva.com/739/tst-mkt-739845.pdf?src-supplier=Digi-Key, ComponentLink1URL=https://datasheet.ciiva.com/739/tst-mkt-739845.pdf?src-supplier=Digi-Key, ComponentLink2Description=https://datasheet.ciiva.com/10018/htst-10018510.pdf?src-supplier=Avnet, ComponentLink2URL=https://datasheet.ciiva.com/10018/htst-10018510.pdf?src-supplier=Avnet, Connector Type="Male Pin", Contact Material=Bronze, Contact Mating Length=0.25inch, Contact Plating=Gold, Depth=9.27mm, Gender=Male, Housing Color=Black, Housing Material=Polyester, Length=27.94mm, Mount="Through Hole", Number of Contacts=16, Number of Positions=16, Number of Rows=2, Orientation=Straight, Packaging=Rail/Tube, Pitch=2.54mm, Pricing 1="1=2.85000, 10=2.73600, 100=2.28000, 500=1.93800, 1000=1.65300, 5000=1.48200 (USD)", REACH SVHC="No SVHC", RoHS=Yes, Row Spacing=0.1inch, Stock 1=227, Supplier 1=Digi-Key, Termination=Solder
H2: "6 Pin 2X3 Through Hole Header"
IC1: "Integrated Circuit", Manufacturer_Name=Microchip, Manufacturer_Part_Number="AVR64DD32-I/PT | MULTI-VOLTAGE I/O", Datasheet Link=https://www.microchip.com/en-us/product/AVR64DD32, Height=1.2mm
J1 J2 J3 J4 J5 J6 J7 J8: "Connector", Manufacturer_Name="Phoenix Contact", Mouser Part Number=651-1803439, Arrow Part Number=1803439, Arrow Price/Stock=https://www.arrow.com/en/products/1803439/phoenix-contact?region=nac, Datasheet Link=http://uk.rs-online.com/web/p/products/2204838, Manufacturer_Part_Number=1803439, Mouser Price/Stock=https://www.mouser.co.uk/ProductDetail/Phoenix-Contact/1803439?qs=ChwaSN6Xm4%2FKqu7eZUAe4w%3D%3D
K1 K2 K3 K4 K5 K6 K7 K8: "General Purpose Relays Commercial RelayRated Carrying Current :15AType of Sealing : Sealed and Waterproof TypeNumber of pole : one poleCoil Voltage : 5VCoil Type : Standard DC CoilContact Form : Form C", Manufacturer_Name=Amphenol, Mouser Part Number=523-AWHSH105D00G, Datasheet Link=http://www.anytek.com.cn/AWHSH112DM00G-15121582407.pdf, Geometry.Height=15.3mm, Manufacturer_Part_Number=AWHSH105D00G, Mouser Price/Stock=https://www.mouser.co.uk/ProductDetail/Amphenol-Anytek/AWHSH105D00G?qs=rSMjJ%252B1ewcT7jFUGTuCYSw%3D%3D
LED1 LED2 LED3 LED4 LED5 LED6 LED7 LED8 LED9 LED10 LED11 LED12 LED13 LED14 LED15 LED16 LED17 LED18 LED19 LED20 LED21 LED22: library part 150060GS75000, "Wurth Elektronik 0603 green", Case Code (Imperial)=0603, Case Code (Metric)=1608, Color=Green, Forward Current=30mA, Forward Voltage=3.2V, Manufacturer="Wurth Electronics", Max Operating Temperature=85°C, Min Operating Temperature=-40°C, Package Quantity=4000, Test Current=20mA, Case/Package=0603, Category=LEDs, ComponentLink1Description=https://datasheet.ciiva.com/29562/150060gs75000-29562868.pdf?src-supplier=Digi-Key, ComponentLink1URL=https://datasheet.ciiva.com/29562/150060gs75000-29562868.pdf?src-supplier=Digi-Key, ComponentLink2Description=https://datasheet.ciiva.com/29279/759427-da-01-en-chipled-0603-w-kl-gruen-150060gs75000-29279201.pdf?src-supplier=Conrad, ComponentLink2URL=https://datasheet.ciiva.com/29279/759427-da-01-en-chipled-0603-w-kl-gruen-150060gs75000-29279201.pdf?src-supplier=Conrad, ComponentLink3Description=https://datasheet.ciiva.com/29562/150060gs75000-29562869.pdf?src-supplier=Digi-Key, ComponentLink3URL=https://datasheet.ciiva.com/29562/150060gs75000-29562869.pdf?src-supplier=Digi-Key, ComponentLink4Description=https://datasheet.ciiva.com/29562/150060gs75000-29562870.pdf?src-supplier=Digi-Key, ComponentLink4URL=https://datasheet.ciiva.com/29562/150060gs75000-29562870.pdf?src-supplier=Digi-Key, Dominant Wavelength=520nm, Height=0.7mm, Lead Free="Lead Free", Length=1.6mm, Lens Style=Clear,Rectangular, Luminous Intensity=430mcd, Manufacturer Part Number=150060GS75000, Mount="Surface Mount", Packaging="Tape and Reel", Pricing 1="1=0.14000, 50=0.13300, 100=0.11400, 500=0.09900 (USD)", REACH SVHC=Unknown, RoHS=Yes, Stock 1=71509, Supplier 1=Digi-Key, Viewing Angle=140°, Wavelength=520nm, Width=0.8mm
LED23: library part 150060RS75000, "Wurth Elektronik 0603 red", Case Code (Imperial)=0603, Case Code (Metric)=1608, Color=Green, Forward Current=30mA, Forward Voltage=3.2V, Manufacturer="Wurth Electronics", Manufacturer Part Number=150060GS75000, Max Operating Temperature=85°C, Min Operating Temperature=-40°C, Package Quantity=4000, Test Current=20mA, Case/Package=0603, Category=LEDs, ComponentLink1Description=https://datasheet.ciiva.com/29562/150060gs75000-29562868.pdf?src-supplier=Digi-Key, ComponentLink1URL=https://datasheet.ciiva.com/29562/150060gs75000-29562868.pdf?src-supplier=Digi-Key, ComponentLink2Description=https://datasheet.ciiva.com/29279/759427-da-01-en-chipled-0603-w-kl-gruen-150060gs75000-29279201.pdf?src-supplier=Conrad, ComponentLink2URL=https://datasheet.ciiva.com/29279/759427-da-01-en-chipled-0603-w-kl-gruen-150060gs75000-29279201.pdf?src-supplier=Conrad, ComponentLink3Description=https://datasheet.ciiva.com/29562/150060gs75000-29562869.pdf?src-supplier=Digi-Key, ComponentLink3URL=https://datasheet.ciiva.com/29562/150060gs75000-29562869.pdf?src-supplier=Digi-Key, ComponentLink4Description=https://datasheet.ciiva.com/29562/150060gs75000-29562870.pdf?src-supplier=Digi-Key, ComponentLink4URL=https://datasheet.ciiva.com/29562/150060gs75000-29562870.pdf?src-supplier=Digi-Key, Dominant Wavelength=520nm, Height=0.7mm, Lead Free="Lead Free", Length=1.6mm, Lens Style=Clear,Rectangular, Luminous Intensity=430mcd, Mount="Surface Mount", Packaging="Tape and Reel", Pricing 1="1=0.14000, 50=0.13300, 100=0.11400, 500=0.09900 (USD)", REACH SVHC=Unknown, RoHS=Yes, Stock 1=71509, Supplier 1=Digi-Key, Viewing Angle=140°, Wavelength=520nm, Width=0.8mm
Q1 Q2 Q3 Q4 Q5 Q6 Q7 Q8: "MOSFET N-Channel 25V 0.5A SOT23 Fairchild FDV301N N-channel MOSFET Transistor, 0.22 A, 25 V, 3-Pin SOT-23", Manufacturer_Name=onsemi, Mouser Part Number=512-FDV301N, Datasheet Link=https://datasheet.datasheetarchive.com/originals/distributors/Datasheets_SAMA/0cce9550595c1a9ba17b856c55fee955.pdf, Geometry.Height=1.11mm, Manufacturer_Part_Number=FDV301N, Mouser Price/Stock=https://www.mouser.co.uk/ProductDetail/onsemi-Fairchild/FDV301N?qs=HK%252BeIG1iaahv7gPT5tsFJQ%3D%3D
R1 R2 R3 R4 R5 R6 R7 R8 R9 R10 R11 R12 R13 R14 R15 R16 R17 R18 R19 R20 R21 R22 R23 R24 R25 R26 R27 R28 R29 R30 R31 R32 R33 R34 R35 R36 R37 R38 R39 R40 R41 R42 R43 R73 R74 R75 R78 R79 R80 R81 R82 R83 R84 R85 R86: library part RC0603JR-070RL, "YAGEO 0603 0 ohm", Manufacturer_Name=KEMET, Mouser Part Number=603-RC0603JR-070RL, Datasheet Link=https://datasheet.datasheetarchive.com/originals/distributors/Datasheets_SAMA/902f9e387b938f871d31120f5fc1d65e.pdf, Geometry.Height=0.55mm, Manufacturer_Part_Number=RC0603JR-070RL, Mouser Price/Stock=https://www.mouser.co.uk/ProductDetail/YAGEO/RC0603JR-070RL?qs=2cAdsCoAWRGWyPcuXgGiXQ%3D%3D
R44 R45 R46 R47 R56 R57 R58 R59 R60 R61 R62 R63 R64 R65 R66 R67 R68 R69 R70 R71 R72 R76 R77: library part RC0603FR-13180RL, "YAGEO 0603 180 ohm", Manufacturer_Name=KEMET, Manufacturer_Part_Number=RC0603JR-070RL, Mouser Part Number=603-RC0603JR-070RL, Datasheet Link=https://datasheet.datasheetarchive.com/originals/distributors/Datasheets_SAMA/902f9e387b938f871d31120f5fc1d65e.pdf, Geometry.Height=0.55mm, Mouser Price/Stock=https://www.mouser.co.uk/ProductDetail/YAGEO/RC0603JR-070RL?qs=2cAdsCoAWRGWyPcuXgGiXQ%3D%3D
R48 R49 R50 R51 R52 R53 R54 R55: library part RC0603FR-104K7L, "YAGEO 0603 4.7k", Manufacturer_Name=KEMET, Manufacturer_Part_Number=RC0603JR-070RL, Mouser Part Number=603-RC0603JR-070RL, Datasheet Link=https://datasheet.datasheetarchive.com/originals/distributors/Datasheets_SAMA/902f9e387b938f871d31120f5fc1d65e.pdf, Geometry.Height=0.55mm, Mouser Price/Stock=https://www.mouser.co.uk/ProductDetail/YAGEO/RC0603JR-070RL?qs=2cAdsCoAWRGWyPcuXgGiXQ%3D%3D
TP1 TP2 TP3 TP4 TP5 TP6 TP7 TP8 TP9 TP10 TP11 TP12 TP13 TP14 TP15 TP16 TP17 TP18: Color=Black, Manufacturer=Samtec, Manufacturer Part Number=TST-105-01-G-D, Max Operating Temperature=125°C, Min Operating Temperature=-55°C, Category="Headers and Wire Housings", ComponentLink1Description=https://datasheet.ciiva.com/739/tst-mkt-739845.pdf?src-supplier=Digi-Key, ComponentLink1URL=https://datasheet.ciiva.com/739/tst-mkt-739845.pdf?src-supplier=Digi-Key, ComponentLink2Description=https://datasheet.ciiva.com/10018/htst-10018510.pdf?src-supplier=Avnet, ComponentLink2URL=https://datasheet.ciiva.com/10018/htst-10018510.pdf?src-supplier=Avnet, Connector Type="Male Pin", Contact Material=Bronze, Contact Mating Length=0.25inch, Contact Plating=Gold, Depth=9.27mm, Gender=Male, Housing Color=Black, Housing Material=Polyester, Length=27.94mm, Mount="Through Hole", Number of Contacts=16, Number of Positions=16, Number of Rows=2, Orientation=Straight, Packaging=Rail/Tube, Pitch=2.54mm, Pricing 1="1=2.85000, 10=2.73600, 100=2.28000, 500=1.93800, 1000=1.65300, 5000=1.48200 (USD)", REACH SVHC="No SVHC", RoHS=Yes, Row Spacing=0.1inch, Stock 1=227, Supplier 1=Digi-Key, Termination=Solder
U1: "Octal Buffers/Drivers With 3-State Outputs", Manufacturer_Name="Texas Instruments", Mouser Part Number=595-SN74ABT240ADBR, Datasheet Link=http://www.ti.com/lit/gpn/sn74abt240a, Geometry.Height=2mm, Manufacturer_Part_Number=SN74ABT240ADBR, Mouser Price/Stock=https://www.mouser.co.uk/ProductDetail/Texas-Instruments/SN74ABT240ADBR?qs=JHHQeKcAU3Dt82k%252BVyiYdw%3D%3D
U2: "Hex Inverters", Manufacturer_Name="Texas Instruments", Mouser Part Number=595-SN74AC04PWR, Datasheet Link=http://www.ti.com/lit/gpn/sn74ac04, Geometry.Height=1.2mm, Manufacturer_Part_Number=SN74AC04PWR, Mouser Price/Stock=https://www.mouser.co.uk/ProductDetail/Texas-Instruments/SN74AC04PWR?qs=RZS%252BpEsUn7pRvPNqsga4SA%3D%3D

## Free pads (board coordinates)
  round 200 hole 170: 37(200,200) 37(200,3800) 37(5400,200) 37(5400,3800)

## Via types
v1: diameter 50, hole 28, Top Layer to Bottom Layer, 120 vias

## Nets (pads, with @x,y where several pads share a name; then routed paths per layer and width w, separated by ;. In a path a pad name is that pad's centre, name@x,y a point inside that pad or via, vN(x,y) a via of type N, cw(c..) or ccw(c..) an arc to the next point about the centre after c; other vN are vias at no path point)
+3.3: H1.3 R64.2 TP1.1 | length 5268.5
  Top Layer w10: H1.3 90,1800 70,1820 70,3584.14 75.86,3590 2704.14,3590 2710,3584.14 2710,3555.86 2715.86,3550 TP1.1
  Bottom Layer w10: R64.2 2493.5,3343.5 2500,3350 2500,3544.14 2505.86,3550 2780,3550 TP1.1@2795,3535
+5: C1.1 C2.1 C3.1 C4.1 C5.1 C6.1 C7.1 C8.1 C9.1 C10.1 C11.1 C12.1 C13.1 C14.1 D1.1 D2.1 D3.1 D4.1 D5.1 D6.1 D7.1 D8.1 H1.1 H2.2 IC1.10 IC1.18 IC1.28 K1.3 K2.3 K3.3 K4.3 K5.3 K6.3 K7.3 K8.3 R44.2 R45.2 R46.2 R47.2 R56.2 R57.2 R58.2 R59.2 R60.2 R61.2 R62.2 R63.2 R65.2 R66.2 R67.2 R68.2 R69.2 R70.2 R71.2 R72.2 R76.2 R77.2 U1.20 U2.14 | length 9824
  Top Layer w10: U1.20 539.76,2924.14 545.62,2930 620,2930 v1(640,2910) ; IC1.10 1424.69,2090.98 1424.69,2121.55 1440,2136.86 1440,2168.55 1445.86,2174.41 1784.14,2174.41 1790,2168.55 v1(1790,2100) ; IC1.28 1514.49,2547.92 1580,2613.43 v1(1580,2650) ; R56.2 2231.5,1481.5 2235.86,1485.86 2244.14,1485.86 v1(2250,1480) ; R44.2 2236.5,3016.5 v1(2240,3020) ; R57.2 v1(2956.5,1486.5) ; R45.2 2976.5,3016.5 v1(2980,3020) ; v1(3410,3530) 3410,3550.91 3415.86,3556.77 U2.14 ; R59.2 3716.5,1486.5 v1(3720,1490) ; R47.2 v1(3746.5,3016.5) v1@3750,3020 ; R58.2 4426.5,1486.5 v1(4430,1490) ; R46.2 v1(4476.5,3016.5)
  Bottom Layer w10: v1(650,3340) 653.5,3343.5 R72.2 R71.2 R70.2 R69.2 R68.2 R67.2 R66.2 R65.2 ; C1.1 C2.1 C4.1 1398.5,2165.86 1404.36,2160 1575.64,2160 1581.5,2165.86 ; v1(1550,3420) 1550,3349.36 1555.86,3343.5 R60.2 R61.2 1780,3348.5 R76.2 R77.2 ; C6.1 C5.1 C3.1 1581.5,2165.86 ; v1(1790,2100) 1790,2154.14 1784.14,2160 1587.35,2160 1581.5,2165.86 ; C11.1 2245,697.44 K5.3 ; C7.1 2247.56,1964.06 K1.3 ; R63.2 2766.5,3343.5 v1(2770,3340) ; K6.3 2970,697.56 C12.1 ; K2.3 2967.56,2220 2967.56,1963.94 C8.1 ; K8.3 3687.56,433.94 C13.1 ; K4.3 3687.56,1963.94 C9.1 ; K7.3 4410,697.56 C14.1 ; K3.3 4407.56,1963.94 C10.1
  Bottom Layer w40: K5.3 2330,700 2340,710 D5.1 ; K1.3 2334.14,2230 2340,2235.86 D3.1 ; K6.3 3050,700 3060,710 D6.1 ; K2.3@2967.56,2220 3050,2220 3060,2230 D1.1 ; K8.3 3770,700 3780,710 D8.1 ; K4.3 3774.14,2230 3780,2235.86 D4.1 ; K7.3 4480,700 4500,720 D7.1 ; K3.3 4490,2230 4500,2240 D2.1
CPU_CS: R12.2 R41.2 R75.1 | length 2547.6
  Top Layer w10: R12.2 1490,1450 1510,1470 v1(1510,1800) R41.2 ; v1(1840,3120) R75.1
  Bottom Layer w10: v1(1510,1800) 1730,1800 1850,1920 1850,3094.14 1847.65,3096.49 1847.65,3112.35 v1(1840,3120)
CPU_D0: R1.1 R17.1 U1.2 | length 3417.2
  Top Layer w10: U1.2 259.8,2830 v1(150,2830) 100,2830 85,2815 85,2055.86 90.86,2050 725.64,2050 731.5,2044.14 R1.1 ; R17.1 v1(1400,2870)
  Bottom Layer w10: v1(150,2830) 150,2980 170,3000 1390,3000 1400,2990 v1(1400,2870)
CPU_D1: R3.1 R19.1 U1.4 | length 3530.9
  Top Layer w10: U1.4 258.62,2780 105.86,2780 100,2774.14 100,2150 150,2100 v1(310,2100) 317.65,2107.65 333.51,2107.65 335.86,2110 784.14,2110 790,2104.14 790,1810 780,1800 R3.1 ; v1(330,2410) 330,2540 355,2565 945,2565 1200,2820 1334.14,2820 1340,2814.14 R19.1
  Bottom Layer w10: v1(310,2100) 310,2105.86 330,2125.86 v1(330,2410)
CPU_D2: R6.1 R21.1 U1.6 | length 3337.5
  Top Layer w10: U1.6 125.86,2727.2 120,2721.35 120,2165.86 125.86,2160 v1(430,2160) 800,2160 820,2140 820,1705.86 814.14,1700 R6.1 ; v1(440,2400) 432.35,2407.65 432.35,2544.14 438.2,2550 960,2550 1200,2790 1270,2790 1280,2780 R21.1
  Bottom Layer w10: v1(430,2160) 430,2374.14 432.35,2376.49 432.35,2392.35 v1(440,2400)
CPU_D3: R9.1 R23.1 U1.8 | length 2777.4
  Top Layer w10: U1.8 155.86,2676.02 150,2670.17 150,2381.21 201.21,2330 484.14,2330 490,2335.86 490,2504.14 495.86,2510 v1(550,2510) R23.1 ; R9.1 v1(840,1600)
  Bottom Layer w10: v1(550,2510) 550,2350 770,2130 929.14,2130 935,2124.14 935,1690.86 844.14,1600 v1(840,1600)
CPU_D4: R11.1 R25.1 U1.11 | length 2196.9
  Top Layer w10: U1.11 775.16,2624.84 v1(780,2620) ; v1@640,2460 765.03,2460 775.03,2450 v1(785.86,2450) R25.1 ; R11.1 v1(800,1500)
  Bottom Layer w10: v1@640,2460 640,2290 780,2150 944.14,2150 950,2144.14 950,1505.86 944.14,1500 v1(800,1500) ; v1(780,2620) 780,2455.86 v1(785.86,2450)
  other v1: 640,2450
CPU_D5: R13.1 R27.1 U1.13 | length 2186.2
  Top Layer w10: U1.13 696.02,2676.02 v1(700,2680) ; v1(700,2390) R27.1 ; R13.1 v1(850,1400)
  Bottom Layer w10: v1(700,2680) 705.86,2674.14 705.86,2665.86 700,2660 v1(700,2390) 700,2290 820,2170 962.65,2170 968.5,2164.14 968.5,1418.5 950,1400 v1(850,1400)
CPU_D6: R15.1 R29.1 U1.15 | length 2488.5
  Top Layer w10: U1.15 877.2,2727.2 v1(880,2730) ; R15.1 v1(840,1300) ; v1(790,2330) R29.1
  Bottom Layer w10: v1(840,1300) 970,1300 990,1320 990,2183.54 984.14,2189.39 860.61,2189.39 790,2260 v1(790,2330) 874.14,2330 880,2335.86 v1(880,2730)
CPU_D7: R16.1 R31.1 U1.17 | length 2627.6
  Top Layer w10: U1.17 828.39,2778.39 850,2800 v1(990,2800) ; R16.1 v1(890,1200) ; v1(930,2270) R31.1
  Bottom Layer w10: v1(890,1200) 892.43,1202.43 1004.14,1202.43 1010,1208.28 1010,2190 v1(930,2270) 1044.14,2270 1050,2275.86 1050,2794.14 1044.14,2800 v1(990,2800)
CPU_nInt: R7.2 R43.2 R73.1 | length 2517.9
  Top Layer w10: R7.2 1384.14,1650 1390,1655.86 R43.2 ; v1(1160,2890) 1156.72,2893.28 1156.72,2936.72 1170,2950 1540,2950 1560,2970 R73.1
  Bottom Layer w10: v1(1110,1650) 1110,2840 v1(1160,2890)
CPU_Reset: R14.2 R20.2 R74.1 | length 3446.3
  Top Layer w10: R14.2 v1(1500,1350) ; R74.1 v1(1700,3130) 1700,3120 1750,3070 R20.2 ; v1(1710,1350) 1760,1350 1770,1360 1770,1750 v1(1900,1880)
  Bottom Layer w10: v1(1500,1350) v1(1710,1350) ; v1(1700,3130) 1690,3140 1690,3204.14 1695.86,3210 1894.14,3210 1900,3204.14 1900,2920 1870,2890 1870,1910 v1(1900,1880)
CPU_RnW: R10.2 R42.2 R78.1 | length 4232.7
  Top Layer w10: R10.2 1440,1550 1450,1560 v1(1450,1730) R42.2 ; v1(2140,3180) 2200,3120 2870,3120 2880,3130 2880,3564.14 2885.86,3570 R78.1
  Bottom Layer w10: v1(1450,1730) 1960,1730 1980,1750 1980,2020 1930,2070 1930,2740 2045,2855 2045,2955 2080,2990 2080,3120 v1(2140,3180)
CPU_RnW_Inverted: LED22.1 U2.2 U2.3 | length 1892.2
  Top Layer w10: LED22.1 2080,3105.86 2085.86,3100 2890,3100 2900,3110 2900,3521.46 2905.86,3527.32 U2.2@3288.47,3527.32 ; U2.3 U2.2
GND: C1.2 C2.2 C3.2 C4.2 C5.2 C6.2 C7.2 C8.2 C9.2 C10.2 C11.2 C12.2 C13.2 C14.2 H1.13 H1.15 H2.6 IC1.19 IC1.29 LED12.1 LED13.1 Q1.2 Q2.2 Q3.2 Q4.2 Q5.2 Q6.2 Q7.2 Q8.2 R48.2 R49.2 R50.2 R51.2 R52.2 R53.2 R54.2 R55.2 U1.1 U1.10 U1.19 U2.7 | length 6356.2
  Top Layer w10: v1(250,2920) 250,2859.02 253.86,2855.16 U1.1 ; v1(260,2520) 260,2624.61 U1.10 ; U1.19 540.2,2830 710,2830 v1(760,2880) ; v1(1460,2590) 1460,2579.18 1487.68,2551.5 1487.68,2424.68 IC1.29 1482.99,2227.01 1504.09,2205.91 IC1.19 ; R49.2@1840,1268.5 1850.75,1279.25 1949.25,1279.25 v1(1950,1280) 1948.66,1281.34 Q5.2 ; Q1.2 1948.66,2861.34 v1(1950,2860) R55.2 ; R51.2 2021.5,1751.5 v1(2050,1780) ; R50.2 2451.5,1418.5 2460,1410 v1(2540,1410) 2542.4,1412.4 Q6.2 ; R54.2 2510.67,2948.5 2529.18,2930 v1(2540,2930) 2550.82,2930 2563.23,2942.4 Q2.2 ; v1(2400,3200) LED13.1 ; v1(2600,3200) LED12.1 ; R53.2 3162.99,2957.01 3180,2940 v1(3280,2940) 3282.4,2942.4 Q4.2 ; v1(3290,1410) 3292.4,1412.4 Q8.2 ; U2.7 3297.56,3400 3404.14,3400 3410,3405.86 v1(3410,3430) ; R52.2 3828.5,2951.5 3840,2940 v1(3990,2940) 3992.4,2942.4 Q3.2 ; R48.2 3901.5,1418.5 3910,1410 v1(3980,1410) 3982.4,1412.4 Q7.2
  Bottom Layer w10: v1(1460,2590) 1460,2584.14 1490,2554.14 1490,2358.5 1475.2,2343.7 1472.24,2343.7 1461.5,2332.95 C1.2 C6.2 C5.2 C2.2 C4.2 C3.2 ; v1(2150,180) 2210,180 2245,215 C11.2 ; v1(2190,1770) 2245,1825 C7.2 ; v1(2880,150) 2970,240 C12.2 ; v1(2900,1660) 2970,1730 C8.2 ; v1(3590,1670) 3690,1770 C9.2 ; v1(3610,120) 3690,200 C13.2 ; v1(4330,130) 4410,210 C14.2 ; v1(4330,1690) 4410,1770 C10.2
NetD1_2: D1.2 K2.1 LED2.1 Q2.3 | length 1648.2
  Top Layer w10: Q2.3 2741.34,2898.66 2800,2840 2800,2735.86 2805.86,2730 LED2.1@2850,2730 ; LED2.1 2850,2610 2855.86,2604.14 2864.14,2604.14 2870,2610 3304.14,2610 3310,2615.86 v1(3310,2720) v1@3302.35,2727.65
  Bottom Layer w10: D1.2 v1(3310,2720)
  Bottom Layer w40: D1.2 3310,2225.86 3315.86,2220 K2.1@3440,2220
NetD2_2: D2.2 K3.1 LED3.1 Q3.3 | length 1627.7
  Top Layer w10: Q3.3 4201.34,2908.66 4240,2870 4240,2735.86 4245.86,2730 4288.5,2730 LED3.1 4290,2615.86 4295.86,2610 4734.14,2610 4740,2615.86 v1(4740,2730) v1@4738.5,2728.5
  Bottom Layer w10: v1(4740,2730) 4740,2520 D2.2
  Bottom Layer w40: D2.2 4750,2235.86 4755.86,2230 K3.1
NetD3_2: D3.2 K1.1 LED1.1 Q1.3 | length 1617.1
  Top Layer w10: Q1.3 2031.34,2918.66 2070,2880 2070,2735.86 2075.86,2730 2128.5,2730 LED1.1 2130,2620 2140,2610 2580.86,2610 2586.72,2615.86 2586.72,2716.72 v1(2590,2720)
  Bottom Layer w10: D3.2 v1(2590,2720)
  Bottom Layer w40: D3.2 2590,2235.86 2595.86,2230 K1.1
NetD4_2: D4.2 K4.1 LED4.1 Q4.3 | length 1642.8
  Top Layer w10: Q4.3 3481.34,2918.66 3520,2880 3520,2734.36 3525.86,2728.5 LED4.1 3570,2620 3580,2610 4024.14,2610 4030,2615.86 v1(4030,2730) v1@4028.5,2728.5
  Bottom Layer w10: D4.2 v1(4030,2730) v1@4037.65,2722.35
  Bottom Layer w40: D4.2 4030,2235.86 4035.86,2230 K4.1
NetD5_2: D5.2 K5.1 LED5.1 Q5.3 | length 1650.6
  Top Layer w10: Q5.3 2031.34,1388.66 2080,1340 2080,1195.86 2085.86,1190 2121.5,1190 LED5.1 2130,1085.86 2135.86,1080 2584.14,1080 2590,1085.86 v1(2590,1200) v1@2588.5,1198.5
  Bottom Layer w10: D5.2 v1(2590,1200)
  Bottom Layer w40: D5.2 2590,705.86 2595.86,700 K5.1
NetD6_2: D6.2 K6.1 LED6.1 Q6.3 | length 1646.1
  Top Layer w10: Q6.3 2741.34,1408.66 2790,1360 2790,1204.36 2795.86,1198.5 LED6.1 2840,1090 2850,1080 3304.14,1080 3310,1085.86 v1(3310,1200) v1@3308.5,1198.5
  Bottom Layer w10: D6.2 v1(3310,1200)
  Bottom Layer w40: D6.2 3310,705.86 3315.86,700 K6.1
NetD7_2: D7.2 K7.1 LED7.1 Q7.3 | length 1619.9
  Top Layer w10: Q7.3 4201.34,1398.66 4240,1360 4240,1205.86 4245.86,1200 4288.5,1200 LED7.1 4290,1085.86 4295.86,1080 4744.14,1080 4750,1085.86 v1(4750,1190) 4750,1192.65 v1@4744.14,1198.5
  Bottom Layer w10: D7.2 v1(4750,1190)
  Bottom Layer w40: D7.2 4750,710 4760,700 K7.1
NetD8_2: D8.2 K8.1 LED8.1 Q8.3 | length 1628.5
  Top Layer w10: Q8.3 3481.34,1398.66 3520,1360 3520,1204.36 3564.14,1204.36 LED8.1 3570,1085.86 3575.86,1080 4014.14,1080 4020,1085.86 v1(4020,1200) v1@4018.5,1198.5
  Bottom Layer w10: v1(4020,1200) 4020,990 D8.2
  Bottom Layer w40: D8.2 4030,705.86 4035.86,700 K8.1
NetH1_2: H1.2 R1.2 | length 368.5
  Top Layer w10: H1.2 R1.2
NetH1_4: H1.4 R3.2 | length 368.5
  Top Layer w10: H1.4 R3.2
NetH1_5: H1.5 R7.1 | length 789.2
  Top Layer w10: H1.5 250,1650 R7.1
NetH1_6: H1.6 R6.2 | length 368.5
  Top Layer w10: H1.6 R6.2
NetH1_7: H1.7 R10.1 | length 789.2
  Top Layer w10: H1.7 250,1550 R10.1
NetH1_8: H1.8 R9.2 | length 368.5
  Top Layer w10: H1.8 R9.2
NetH1_9: H1.9 R12.1 | length 789.2
  Top Layer w10: H1.9 250,1450 R12.1
NetH1_10: H1.10 R11.2 | length 368.5
  Top Layer w10: H1.10 R11.2
NetH1_11: H1.11 R14.1 | length 789.2
  Top Layer w10: H1.11 250,1350 R14.1
NetH1_12: H1.12 R13.2 | length 368.5
  Top Layer w10: H1.12 R13.2
NetH1_14: H1.14 R15.2 | length 368.5
  Top Layer w10: H1.14 R15.2
NetH1_16: H1.16 R16.2 | length 368.5
  Top Layer w10: H1.16 R16.2
NetH2_1: H2.1 R2.2 | length 168.5
  Top Layer w10: H2.1 R2.2
NetH2_3: H2.3 R4.2 | length 168.5
  Top Layer w10: H2.3 R4.2
NetH2_4: H2.4 R5.1 | length 148.5
  Top Layer w10: R5.1 H2.4
NetH2_5: H2.5 R8.2 | length 168.5
  Top Layer w10: H2.5 R8.2
NetIC1_1: IC1.1 R23.2 | length 358
  Top Layer w10: R23.2 1180,2510 1210,2480 1210,2400 1246.61,2363.39 IC1.1
NetIC1_2: IC1.2 R25.2 | length 346.2
  Top Layer w10: R25.2 1180,2450 1190,2440 1190,2360 1218.11,2331.89 IC1.2
NetIC1_3: IC1.3 R27.2 | length 304.4
  Top Layer w10: R27.2 1160,2390 1170,2380 1170,2351.72 1221.72,2300 1331.5,2300 IC1.3
NetIC1_4: IC1.4 R29.2 | length 275.7
  Top Layer w10: R29.2 1140,2330 1201.1,2268.9 IC1.4
NetIC1_5: IC1.5 R31.2 | length 264.8
  Top Layer w10: R31.2 1150,2270 1183.71,2236.29 1330.78,2236.29 IC1.5
NetIC1_6: IC1.6 R34.2 | length 252.1
  Top Layer w10: R34.2 1327.8,2210 IC1.6
NetIC1_7: IC1.7 R36.2 | length 260.5
  Top Layer w10: R36.2 1091.5,2160 1190,2160 1204.41,2174.41 IC1.7
NetIC1_8: IC1.8 R38.2 | length 298.8
  Top Layer w10: R38.2 1324.14,2090 1330,2095.86 1330,2141.02 IC1.8
NetIC1_9: IC1.9 R40.2 | length 206.4
  Top Layer w10: R40.2 1330,2014.14 1335.86,2020 1382.65,2020 1388.5,2025.86 IC1.9
NetIC1_11: IC1.11 R43.1 | length 180.3
  Top Layer w10: R43.1 1390,1965.86 1451.5,2027.35 IC1.11
NetIC1_12: IC1.12 R42.1 | length 167
  Top Layer w10: R42.1 1450,1980 1482.99,2012.99 IC1.12
NetIC1_13: IC1.13 R41.1 | length 156.7
  Top Layer w10: R41.1 1510,2081.81 IC1.13
NetIC1_14: IC1.14 R39.1 | length 164.8
  Top Layer w10: IC1.14 1550,2082.28 1550,1970 1563.61,1956.39 1563.61,1937.88 R39.1
NetIC1_15: IC1.15 R37.1 | length 196.6
  Top Layer w10: IC1.15 1577.48,1992.52 1590,1980 1624.14,1980 1630,1974.14 R37.1
NetIC1_16: IC1.16 R35.1 | length 225.9
  Top Layer w10: IC1.16 1608.98,2021.02 1620,2010 1684.14,2010 1690,2004.14 R35.1
NetIC1_17: IC1.17 R33.1 | length 279.1
  Top Layer w10: IC1.17 1673.19,2142.91 1680,2136.1 1680,2055.86 1685.86,2050 1750,2050 1790,2010 1828.5,2010 R33.1
NetIC1_20: IC1.20 R32.1 | length 178.1
  Top Layer w10: IC1.20 1668.19,2240 1740,2240 1750,2230 R32.1
NetIC1_21: IC1.21 R30.1 | length 184.1
  Top Layer w10: IC1.21 1778.9,2268.9 1790,2280 1790,2284.14 1795.86,2290 R30.1
NetIC1_22: IC1.22 R28.1 | length 215.7
  Top Layer w10: IC1.22 1764.14,2300.39 1770,2306.25 1770,2344.14 1775.86,2350 R28.1
NetIC1_23: IC1.23 R26.1 | length 244.2
  Top Layer w10: IC1.23 1743.11,2331.89 1748.97,2337.75 1748.97,2404.14 1754.82,2410 R26.1
NetIC1_24: IC1.24 R24.1 | length 259.4
  Top Layer w10: IC1.24 1665.59,2435.59 1700,2470 R24.1
NetIC1_25: IC1.25 R22.1 | length 392.1
  Top Layer w10: IC1.25 1608.98,2468.98 1645.86,2505.86 1765.86,2505.86 1810,2550 R22.1
NetIC1_26: IC1.26 R20.1 | length 407.6
  Top Layer w10: IC1.26 1577.48,2527.48 1744.14,2527.48 1750,2533.34 R20.1
NetIC1_27: IC1.27 R18.1 | length 365
  Top Layer w10: IC1.27 1545.98,2535.98 1570,2560 1684.14,2560 1690,2565.86 R18.1
NetIC1_30: IC1.30 R17.2 | length 263.9
  Top Layer w10: R17.2@1400,2662.57 1400,2560 1450,2510 1450,2421.5 IC1.30
NetIC1_31: IC1.31 R19.2 | length 296.6
  Top Layer w10: R19.2@1340,2660.02 1340,2540 1370,2510 1410,2510 1420,2500 IC1.31
NetIC1_32: IC1.32 R21.2 | length 330.6
  Top Layer w10: R21.2@1290,2656.83 1290,2495.86 1295.86,2490 1384.14,2490 1390,2484.14 1390,2421.5 IC1.32
NetLED1_2: LED1.2 R44.1 | length 162
  Top Layer w10: LED1.2 R44.1
NetLED2_2: LED2.2 R45.1 | length 162
  Top Layer w10: LED2.2 R45.1
NetLED3_2: LED3.2 R46.1 | length 162
  Top Layer w10: LED3.2 R46.1
NetLED4_2: LED4.2 R47.1 | length 162
  Top Layer w10: LED4.2 R47.1
NetLED5_2: LED5.2 R56.1 | length 157
  Top Layer w10: LED5.2 R56.1
NetLED6_2: LED6.2 R57.1 | length 162
  Top Layer w10: LED6.2 R57.1
NetLED7_2: LED7.2 R58.1 | length 162
  Top Layer w10: LED7.2 R58.1
NetLED8_2: LED8.2 R59.1 | length 162
  Top Layer w10: LED8.2 R59.1
NetLED9_1: LED9.1 R73.2 | length 165.7
  Top Layer w10: R73.2 1561.5,3250 1629.14,3250 1635,3255.86 LED9.1
NetLED9_2: LED9.2 R60.1 | length 137
  Top Layer w10: LED9.2 v1@1635,3475
  Bottom Layer w10: R60.1 v1@1635,3475
  other v1: 1635,3470
NetLED10_1: LED10.1 R74.2 | length 160.3
  Top Layer w10: R74.2 1701.5,3250 1760,3250 1775,3265 LED10.1
NetLED10_2: LED10.2 R61.1 | length 131.1
  Top Layer w10: LED10.2 1780,3411.5 v1(1780,3470)
  Bottom Layer w10: R61.1 1775,3465 v1(1780,3470)
NetLED11_1: LED11.1 R75.2 | length 167
  Top Layer w10: R75.2 1911.5,3251.5 1920,3260 LED11.1
NetLED11_2: LED11.2 R62.1 | length 127
  Top Layer w10: LED11.2 v1(1920,3470)
  Bottom Layer w10: R62.1 v1(1920,3470)
NetLED12_2: LED12.2 R63.1 | length 127
  Top Layer w10: LED12.2 v1(2600,3470)
  Bottom Layer w10: R63.1 v1(2600,3470)
NetLED13_2: LED13.2 R64.1 | length 127
  Top Layer w10: LED13.2 v1(2400,3470)
  Bottom Layer w10: R64.1 v1(2400,3470)
NetLED14_1: LED14.1 U1.18 | length 1551.4
  Top Layer w10: U1.18 475.86,2803.98 470,2809.83 470,2964.14 475.86,2970 1390,2970 1460,3040 LED14.1
NetLED14_2: LED14.2 R65.1 | length 127
  Top Layer w10: LED14.2 v1(1460,3470)
  Bottom Layer w10: R65.1 v1(1460,3470)
NetLED15_1: LED15.1 U1.16 | length 1557.8
  Top Layer w10: U1.16 455.86,2752.8 450,2758.65 450,2980 460,2990 1320,2990 1360,3030 LED15.1
NetLED15_2: LED15.2 R66.1 | length 127
  Top Layer w10: LED15.2 v1(1360,3470)
  Bottom Layer w10: R66.1 v1(1360,3470)
NetLED16_1: LED16.1 U1.14 | length 1561.6
  Top Layer w10: U1.14 448.39,2701.61 430,2720 430,3004.14 435.86,3010 1250,3010 1260,3020 LED16.1
NetLED16_2: LED16.2 R67.1 | length 127
  Top Layer w10: LED16.2 v1(1260,3470)
  Bottom Layer w10: R67.1 v1(1260,3470)
NetLED17_1: LED17.1 U1.12 | length 1542.8
  Top Layer w10: U1.12 449.57,2650.43 410,2690 410,3024.14 415.86,3030 1154.14,3030 1160,3035.86 LED17.1
NetLED17_2: LED17.2 R68.1 | length 127
  Top Layer w10: LED17.2 v1(1160,3470)
  Bottom Layer w10: R68.1 v1(1160,3470)
NetLED18_1: LED18.1 U1.9 | length 1428.4
  Top Layer w10: U1.9 364.14,2650.43 390,2676.29 390,3044.14 395.86,3050 981.64,3050 1060,3128.36 LED18.1
NetLED18_2: LED18.2 R69.1 | length 127
  Top Layer w10: LED18.2 v1(1060,3470)
  Bottom Layer w10: R69.1 v1(1060,3470)
NetLED19_1: LED19.1 U1.7 | length 1304
  Top Layer w10: U1.7 361.61,2701.61 370,2710 370,3064.14 375.86,3070 910,3070 960,3120 LED19.1
NetLED19_2: LED19.2 R70.1 | length 127
  Top Layer w10: LED19.2 v1(960,3470)
  Bottom Layer w10: R70.1 v1(960,3470)
NetLED20_1: LED20.1 U1.5 | length 1166.7
  Top Layer w10: U1.5 261.97,2751.06 341.06,2751.06 350,2760 350,3084.14 355.86,3090 830,3090 860,3120 LED20.1
NetLED20_2: LED20.2 R71.1 | length 127
  Top Layer w10: LED20.2 v1(860,3470)
  Bottom Layer w10: R71.1 v1(860,3470)
NetLED21_1: LED21.1 U1.3 | length 1019.7
  Top Layer w10: U1.3 261.97,2805.71 324.14,2805.71 330,2811.57 330,3100 350,3120 754.14,3120 760,3125.86 LED21.1
NetLED21_2: LED21.2 R72.1 | length 147
  Top Layer w10: LED21.2 v1@760,3480
  Bottom Layer w10: R72.1 v1@760,3480
  other v1: 760,3470
NetLED22_2: LED22.2 R76.1 | length 142
  Top Layer w10: LED22.2 v1@2080,3480
  Bottom Layer w10: R76.1 v1@2080,3480
  other v1: 2080,3470
NetLED23_1: LED23.1 U2.4 | length 1614.4
  Top Layer w10: LED23.1 2200,3145.86 2205.86,3140 2820,3140 2830,3150 v1(2830,3190) ; v1(2960,3460) 2960,3470.82 2972.43,3483.25 2972.43,3484.14 2978.28,3490 3050,3490 3060,3480 U2.4
  Bottom Layer w10: v1(2830,3190) 2830,3430 2860,3460 v1(2960,3460)
NetLED23_2: LED23.2 R77.1 | length 122
  Top Layer w10: LED23.2 v1(2200,3470)
  Bottom Layer w10: R77.1 v1(2200,3470)
NetR4_1: R4.1 TP2.1 | length 1132.4
  Top Layer w10: TP2.1 590,330 590,295.86 595.86,290 1144.14,290 1150,295.86 1150,694.14 1144.14,700 R4.1
NetR5_2: R5.2 TP3.1 | length 567.2
  Top Layer w10: R5.2 488.5,501.5 510,480 700,480 720,460 TP3.1
NetR8_1: R8.1 TP4.1 | length 921.4
  Top Layer w10: TP4.1 900,400 v1(900,540) ; v1(900,880) 1099.89,880 1105.75,874.14 1105.75,800 R8.1
  Bottom Layer w10: v1(900,540) v1(900,880)
NetR34_1: R34.1 TP5.1 | length 2512.1
  Top Layer w10: v1(870,1780) 869.14,1780.86 869.14,1789.14 870,1790 870,2200 880,2210 R34.1
  Bottom Layer w10: v1(870,1780) 864.14,1780 844.14,1760 720,1760 720,980 630,890 630,485.86 635.86,480 954.14,480 960,474.14 TP5.1
NetR36_1: R36.1 TP6.1 | length 2027.9
  Top Layer w10: R36.1 925.86,2150 920,2144.14 920,1860 1030,1750 v1(1070,1750)
  Bottom Layer w10: v1(1070,1750) 1030,1710 1030,390 TP6.1
NetR37_2: R37.2 TP7.1 | length 1858.9
  Top Layer w10: TP7.1 1200,670 1230,700 1490,700 1630,840 R37.2
NetR38_1: R38.1 TP8.1 | length 1874.9
  Top Layer w10: R38.1 1018.5,1961.5 v1(1250,1730)
  Bottom Layer w10: v1(1250,1730) 1320,1660 TP8.1
NetR39_2: R39.2 TP9.1 | length 1629.2
  Top Layer w10: v1(1440,790) 1520,790 1570,840 R39.2
  Bottom Layer w10: TP9.1 v1(1440,790)
NetR40_1: R40.1 TP10.1 | length 1682.5
  Top Layer w10: v1(1330,1760) 1329.14,1760.86 1329.14,1769.14 1330,1770 R40.1 ; TP10.1 1560,670 v1(1630,740)
  Bottom Layer w10: v1(1330,1760) 1360,1730 1360,1010 v1(1630,740)
NetR78_2: R78.2 U2.1 | length 138.3
  Top Layer w10: R78.2 3171.5,3560 3230,3560 3233.23,3556.77 U2.1
NetR79_1: R79.1 TP11.1 | length 1914.8
  Top Layer w10: v1(3010,3390) 3010,3430 3030,3450 R79.1
  Bottom Layer w10: v1(3010,3390) 3010,3430 3030,3450 3144.14,3450 3150,3444.14 3150,3280 3170,3260 3820,3260 3840,3280 3840,3660 3880,3700 TP11.1
NetR79_2: R79.2 U2.5 | length 134.7
  Top Layer w10: R79.2 3269.74,3450 3274.15,3454.41 U2.5
NetR80_1: R80.1 U2.6 | length 171.6
  Top Layer w10: R80.1 3220,3380 3230,3390 3230,3420 3240,3430 3293.15,3430 U2.6
NetR80_2: R80.2 TP12.1 | length 1764.5
  Top Layer w10: R80.2 3098.5,3291.5 3150,3240 v1(3880,3240)
  Bottom Layer w10: v1(3880,3240) 3880,3624.14 3885.86,3630 4294.14,3630 4300,3635.86 TP12.1
NetR81_1: R81.1 TP13.1 | length 1159.9
  Top Layer w10: R81.1@3781.5,3380 3950,3380 3990,3340 4504.14,3340 4510,3345.86 4510,3600 4500,3610 4450,3610 4440,3620 TP13.1
NetR81_2: R81.2 U2.9 | length 217.2
  Top Layer w10: U2.9 3601.18,3428.82 3660,3370 R81.2
NetR82_1: R82.1 U2.8 | length 282.6
  Top Layer w10: U2.8 3525.67,3315.86 3531.53,3310 R82.1
NetR82_2: R82.2 TP14.1 | length 1381.6
  Top Layer w10: R82.2 4674.14,3310 4680,3315.86 4680,3694.14 4674.14,3700 TP14.1
NetR83_1: R83.1 TP15.1 | length 382.6
  Top Layer w10: R83.1 4150,3490 TP15.1
NetR83_2: R83.2 U2.11 | length 197
  Top Layer w10: U2.11 3630,3480 3640,3490 R83.2
NetR84_1: R84.1 U2.10 | length 202.9
  Top Layer w10: U2.10 3635.59,3454.41 3660,3430 R84.1
NetR84_2: R84.2 TP16.1 | length 654.1
  Top Layer w10: R84.2@3781.5,3440 3970,3440 4040,3370 4294.14,3370 4300,3375.86 TP16.1
NetR85_1: R85.1 TP17.1 | length 753.4
  Top Layer w10: R85.1 4380,3610 4440,3550 TP17.1
NetR85_2: R85.2 U2.13 | length 264
  Top Layer w10: U2.13 3526.85,3530 3590,3530 3600,3540 3600,3604.14 3605.86,3610 R85.2
NetR86_1: R86.1 U2.12 | length 230.4
  Top Layer w10: U2.12 3614.14,3505.59 3620,3511.45 3620,3544.14 3625.86,3550 R86.1
NetR86_2: R86.2 TP18.1 | length 941.6
  Top Layer w10: R86.2 v1(4000,3550)
  Bottom Layer w10: v1(4000,3550) 4003.28,3553.28 4033.28,3553.28 4080,3600 4570,3600 4590,3580 4590,3490 TP18.1
Relay_1: Q1.1 R22.2 R55.1 | length 608
  Top Layer w10: Q1.1 1847.6,3017.6 1810,2980 R22.2 1884.14,2721.5 1890,2715.64 1890,2665.86 1895.86,2660 1948.5,2660 R55.1
Relay_1_Com: J1.2 K1.4 | length 422.8
  Bottom Layer w10: J1.2@2480,1730 J1.2@2483.78,1733.78
  Bottom Layer w40: J1.2@2483.78,1733.78 K1.4
Relay_1_N_Closed: J1.3 K1.5 | length 1231.1
  Bottom Layer w40: K1.5 2454.14,2710.32 2460,2704.46 2460,2260 2335,2135 J1.3
Relay_1_N_Open: J1.1 K1.2 | length 1278.2
  Bottom Layer w40: J1.1 2816.57,1740 2840,1763.43 2840,2704.46 2834.14,2710.32 K1.2
Relay_2: Q2.1 R24.2 R54.1 | length 1362.9
  Top Layer w10: R24.2 1911.5,2480 1970,2480 v1(2000,2510) ; R54.1 2366.1,3017.6 v1(2460,3017.6) Q2.1
  Bottom Layer w10: v1(2000,2510) 2040,2510 2060,2530 2060,2800 2070,2810 2454.14,2810 2460,2815.86 v1(2460,3017.6)
Relay_2_Com: J3.2 K2.4 | length 422.8
  Bottom Layer w10: J3.2@3200,1730 J3.2@3203.78,1733.78
  Bottom Layer w40: J3.2@3203.78,1733.78 K2.4
Relay_2_N_Closed: J3.3 K2.5 | length 1233.2
  Bottom Layer w10: J3.3 J3.3@3060,1750
  Bottom Layer w40: K2.5 3174.14,2710.32 3180,2704.46 3180,2260 3060,2140 J3.3@3060,1750
Relay_2_N_Open: J3.1 K2.2 | length 1295.8
  Bottom Layer w40: J3.1 3542.9,1740 3566.33,1763.43 3566.33,2704.46 3560.48,2710.32 K2.2
Relay_3: Q4.1 R26.2 R53.1 | length 2166.1
  Top Layer w10: R26.2 v1(2020,2410) ; R53.1 v1(3210,3020) 3212.4,3017.6 Q4.1
  Bottom Layer w10: v1(2020,2410) 2027.65,2417.65 2027.65,2437.65 2080,2490 2080,2789.14 2085.86,2795 3204.14,2795 3210,2800.86 v1(3210,3020)
Relay_3_Com: J5.2 K4.4 | length 422.8
  Bottom Layer w10: J5.2@3920,1730 J5.2@3923.78,1733.78
  Bottom Layer w40: J5.2@3923.78,1733.78 K4.4
Relay_3_N_Closed: J5.3 K4.5 | length 1245.2
  Bottom Layer w40: K4.5 3904.14,2710.32 3910,2704.46 3910,2270 3775,2135 J5.3
Relay_3_N_Open: J5.1 K4.2 | length 1275.5
  Bottom Layer w40: J5.1 4256.57,1740 4280,1763.43 4280,2700 4269.69,2710.32 K4.2
Relay_4: Q3.1 R28.2 R52.1 | length 2954.8
  Top Layer w10: R28.2 v1(2080,2350) ; R52.1 3890,3108.5 v1(3890,3020) 3892.4,3017.6 Q3.1
  Bottom Layer w10: v1(2080,2350) 2080,2438.79 2095,2453.79 2095,2774.14 2100.86,2780 3870,2780 3890,2800 v1(3890,3020)
Relay_4_Com: J7.2 K3.4 | length 422.8
  Bottom Layer w10: J7.2@4640,1730 J7.2@4643.78,1733.78
  Bottom Layer w40: J7.2@4643.78,1733.78 K3.4
Relay_4_N_Closed: J7.3 K3.5 | length 1231.1
  Bottom Layer w40: K3.5 4614.14,2710.32 4620,2704.46 4620,2260 4495,2135 J7.3
Relay_4_N_Open: J7.1 K3.2 | length 1267.9
  Bottom Layer w40: J7.1 4976.57,1740 5000,1763.43 5000,2686.88 4976.57,2710.32 K3.2
Relay_5: Q5.1 R30.2 R51.1 | length 1343.1
  Top Layer w10: R30.2 2124.14,2290 2130,2284.14 2130,1555.86 2124.14,1550 1950,1550 ; Q5.1 1950,1488.94 1950,1550 ; R51.1 1950,1550
Relay_5_Com: J2.2 K5.4 | length 422.8
  Bottom Layer w10: J2.2@2480,200 J2.2@2483.78,203.78
  Bottom Layer w40: J2.2@2483.78,203.78 K5.4
Relay_5_N_Closed: J2.3 K5.5 | length 1231.1
  Bottom Layer w10: J2.3 J2.3@2340,215
  Bottom Layer w40: K5.5 2454.14,1180.32 2460,1174.46 2460,740 2340,620 J2.3@2340,215
Relay_5_N_Open: J2.1 K5.2 | length 1275.5
  Bottom Layer w40: J2.1 2816.57,210 2840,233.43 2840,1170 2829.68,1180.32 K5.2
Relay_6: Q6.1 R32.2 R50.1 | length 1571.2
  Top Layer w10: R32.2 2103.28,2230 2109.14,2224.14 2109.14,2220.86 2110,2220 2110,1700 v1(2050,1640) ; v1(2210,1640) 2350,1640 2360,1630 2360,1493.46 2365.86,1487.6 Q6.1
  Bottom Layer w10: v1(2050,1640) v1(2210,1640)
Relay_6_Com: J4.2 K6.4 | length 422.8